# Altium PCB TMTT.PcbDoc
Units mm, origin at the board's own origin, x right, y up, seen from the top; angles counter-clockwise.
Board outline 65.81 x 59.41 mm, 8 copper layers (Top Layer, Layer 1, Layer 2, Layer 3, Layer 4, Layer 5, Layer 6, Bottom Layer), stack 1.028 mm thick; 16 components, 21 nets, 119 pads, 1224 vias.
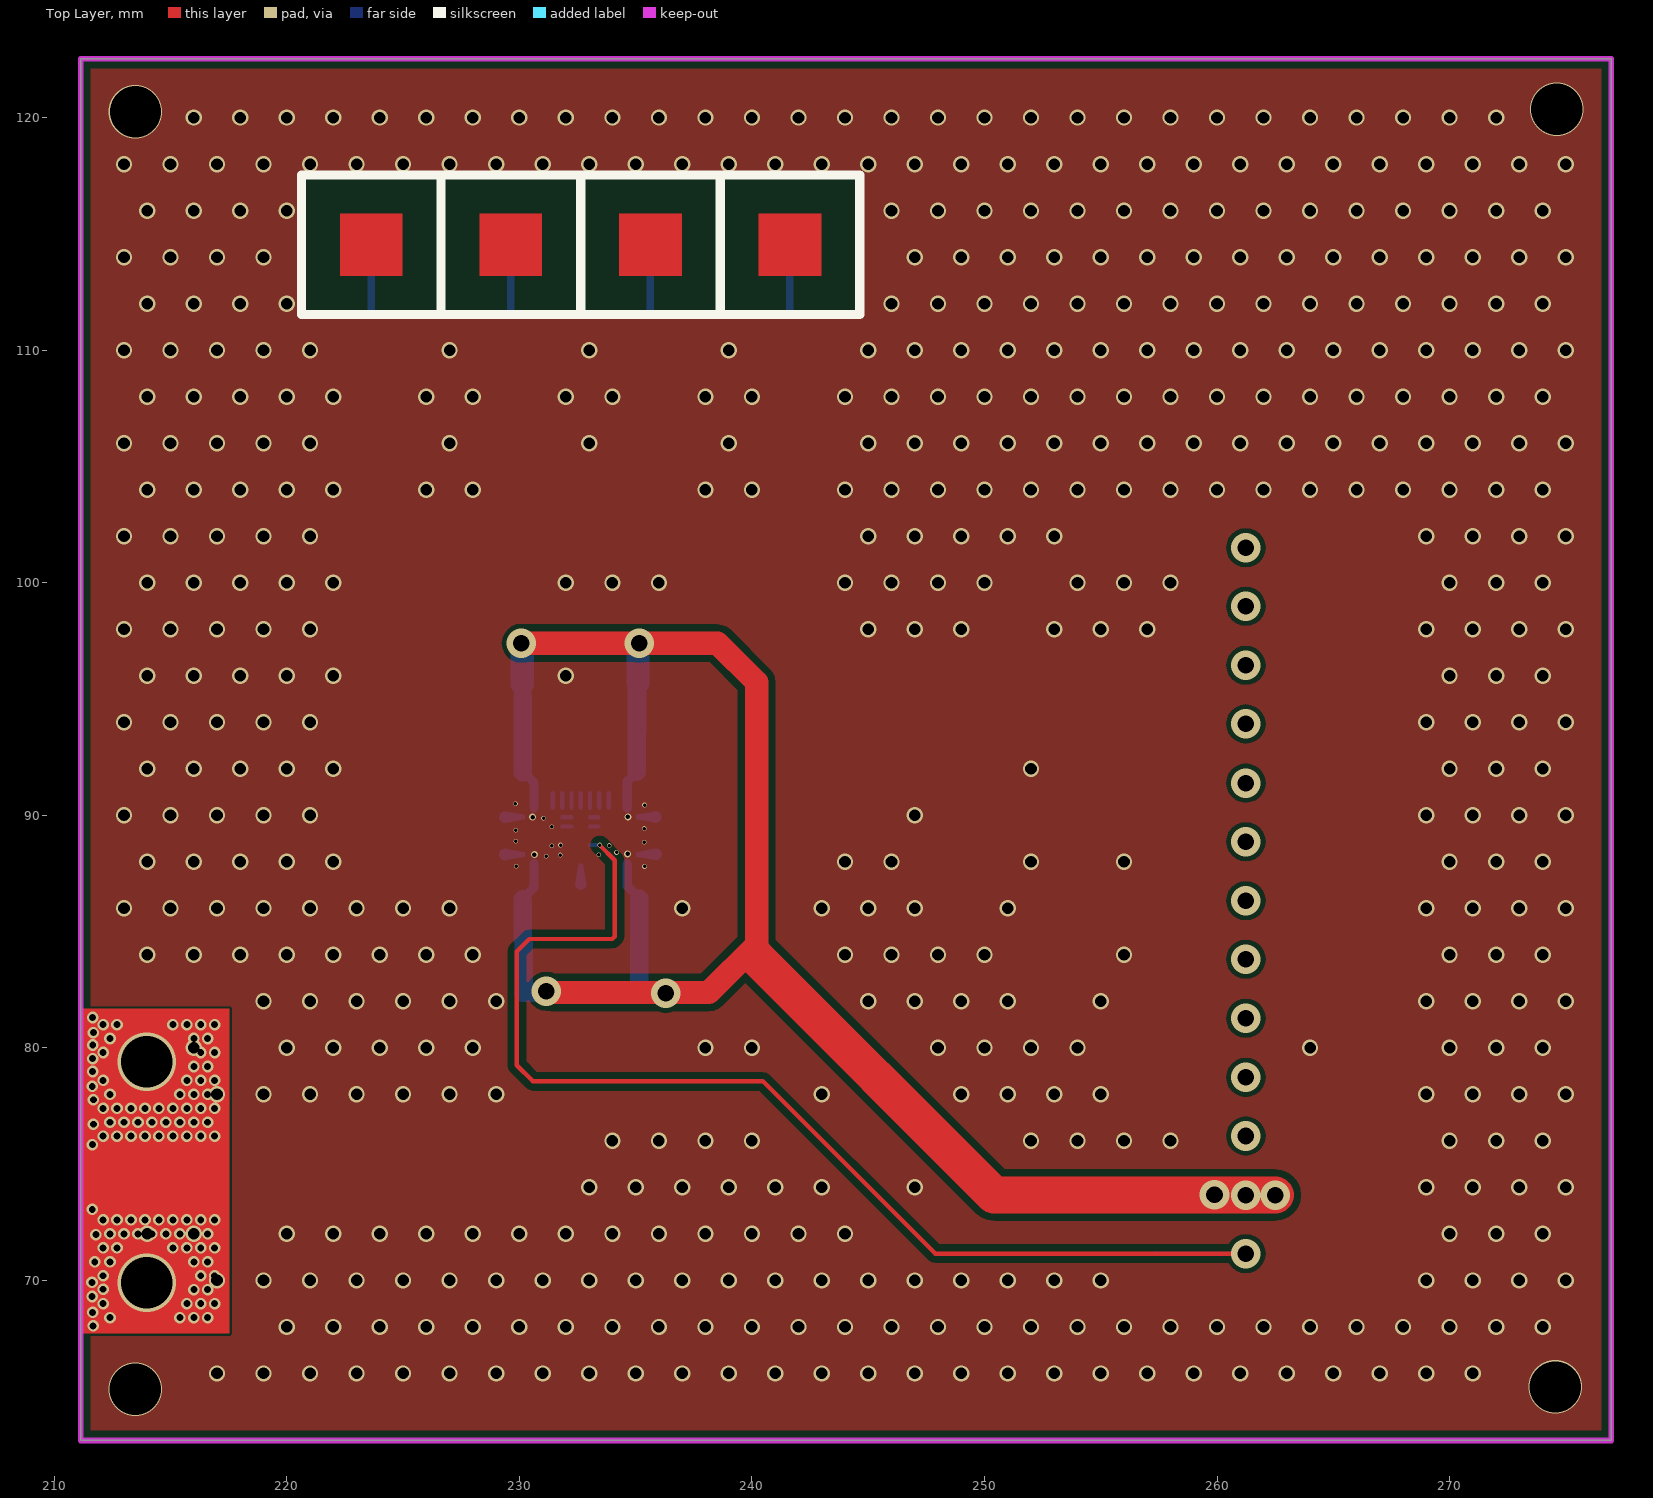
[diagram p0: Top Layer view]
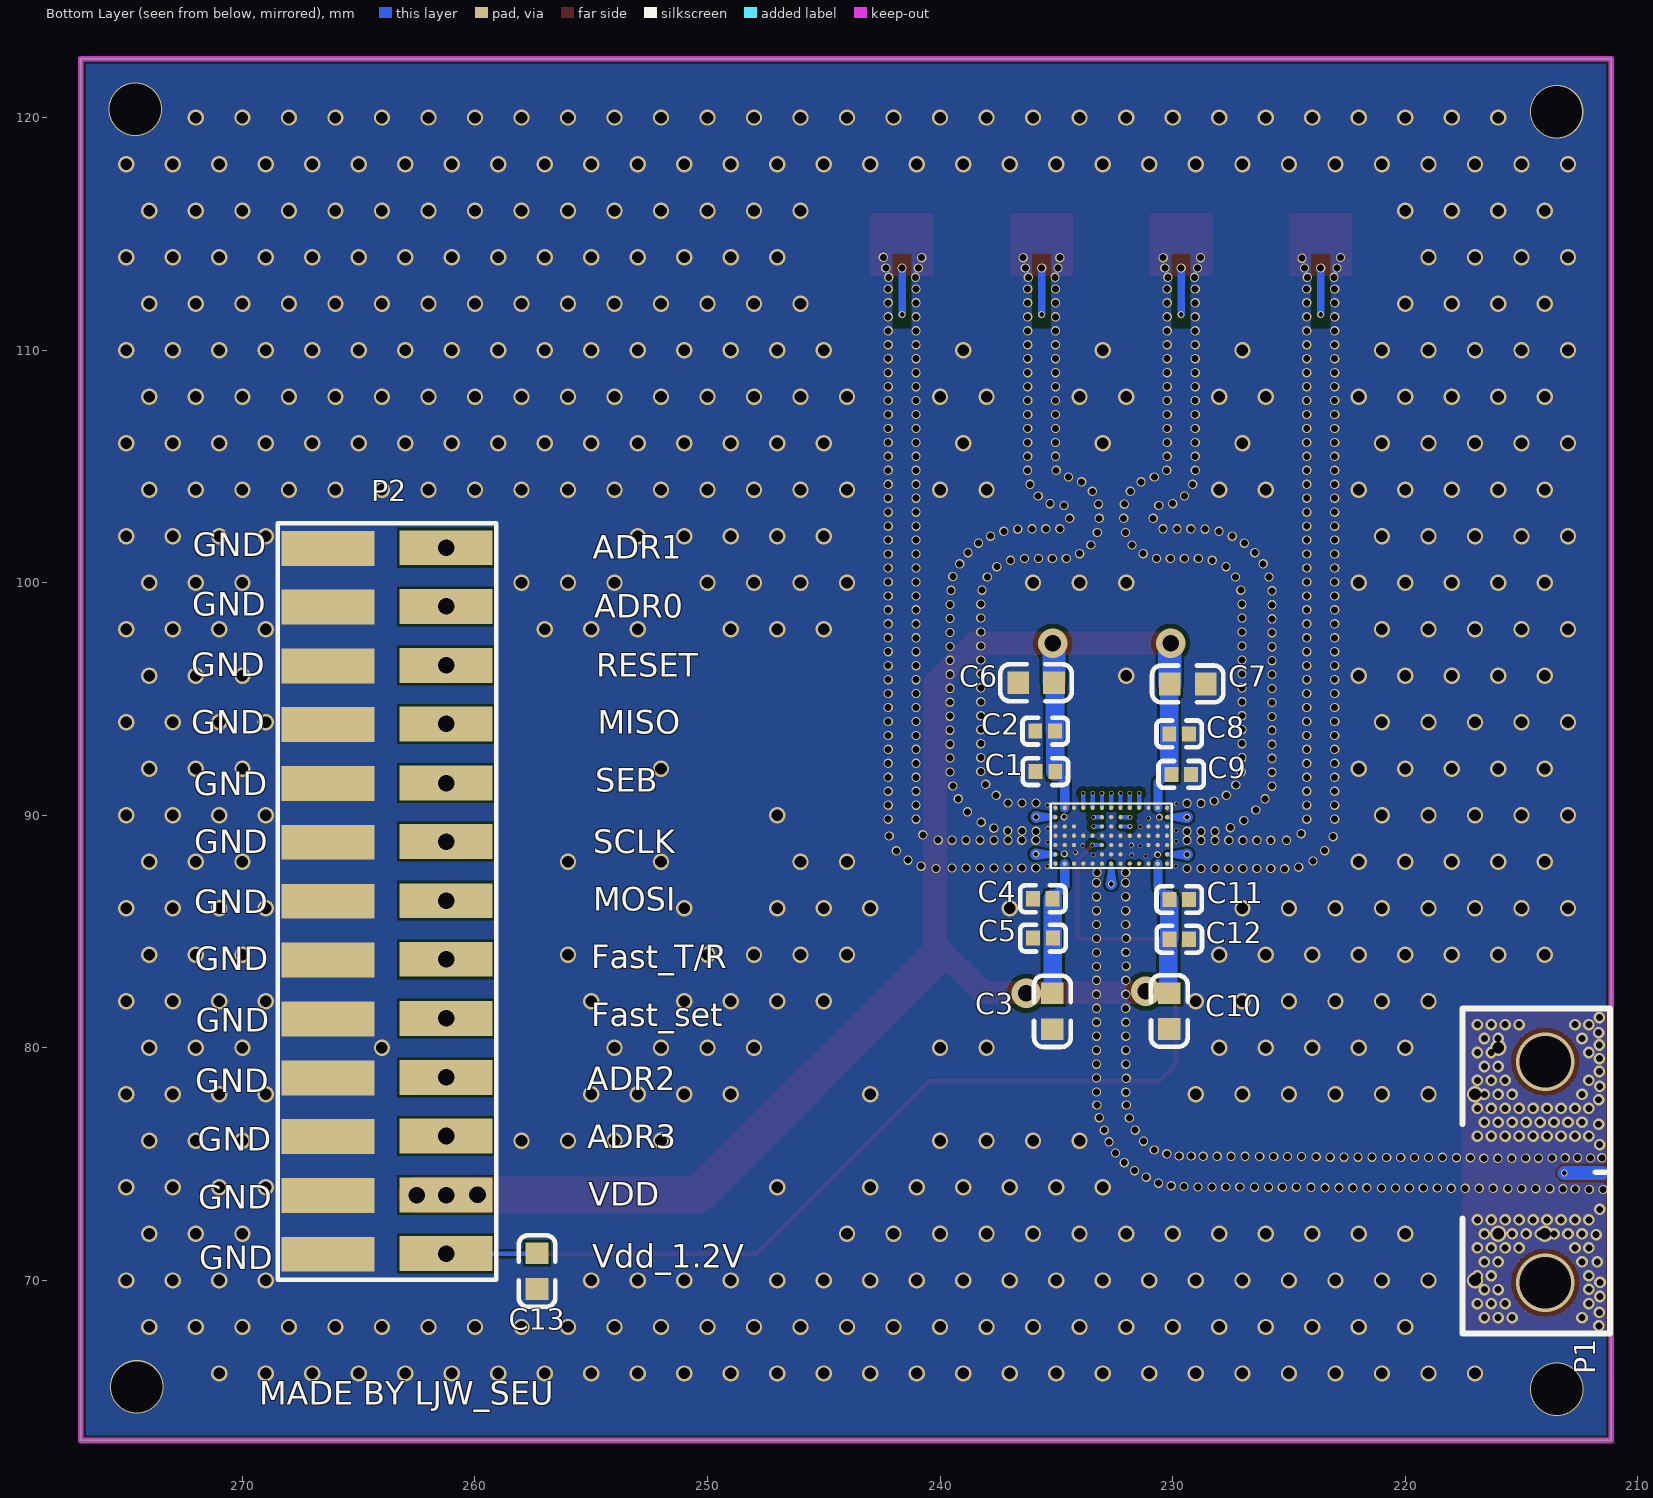
[diagram p1: Bottom Layer view, seen from below]
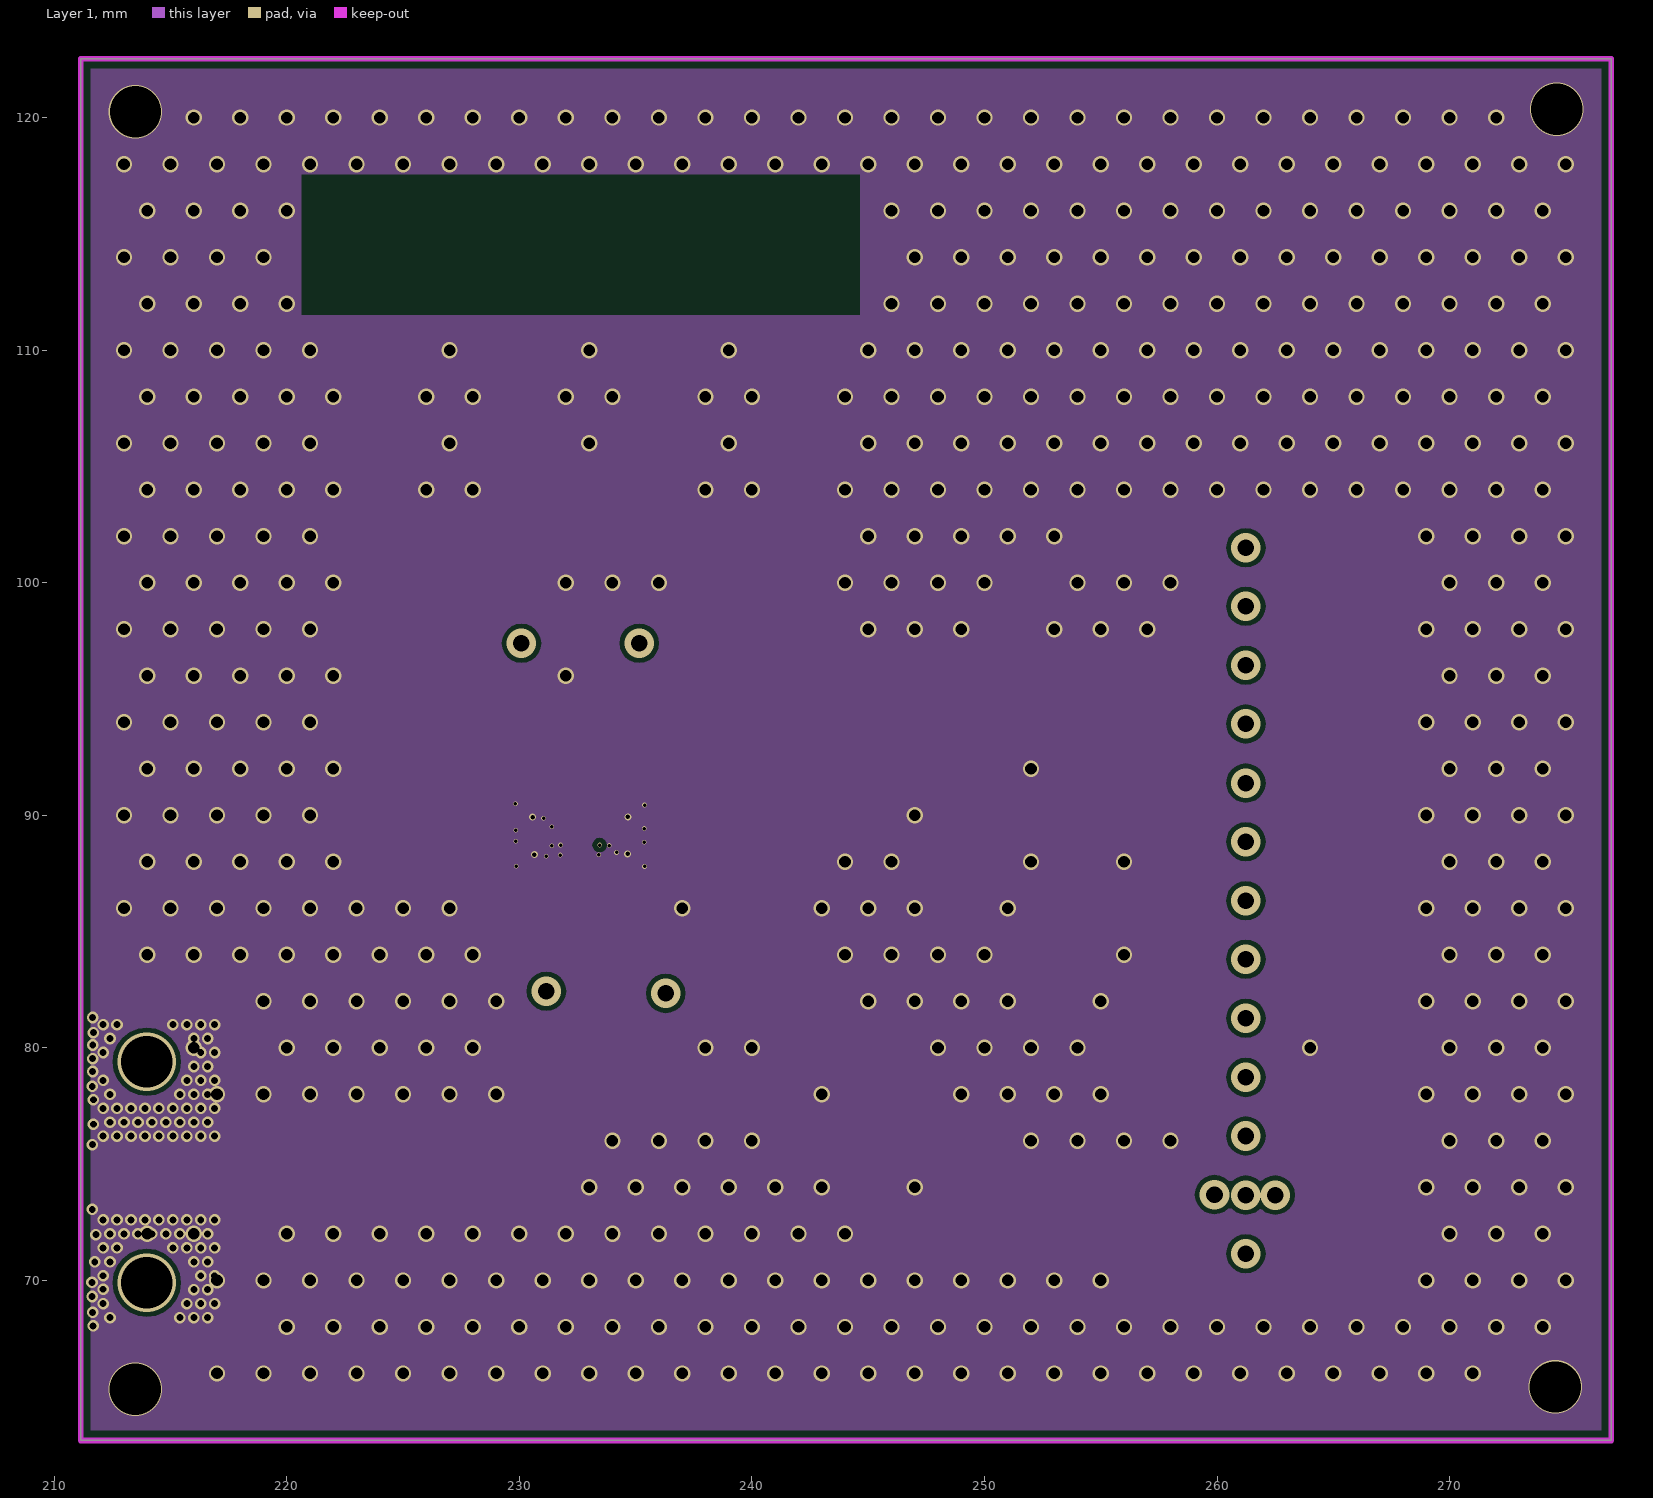
[diagram p2: Layer 1]
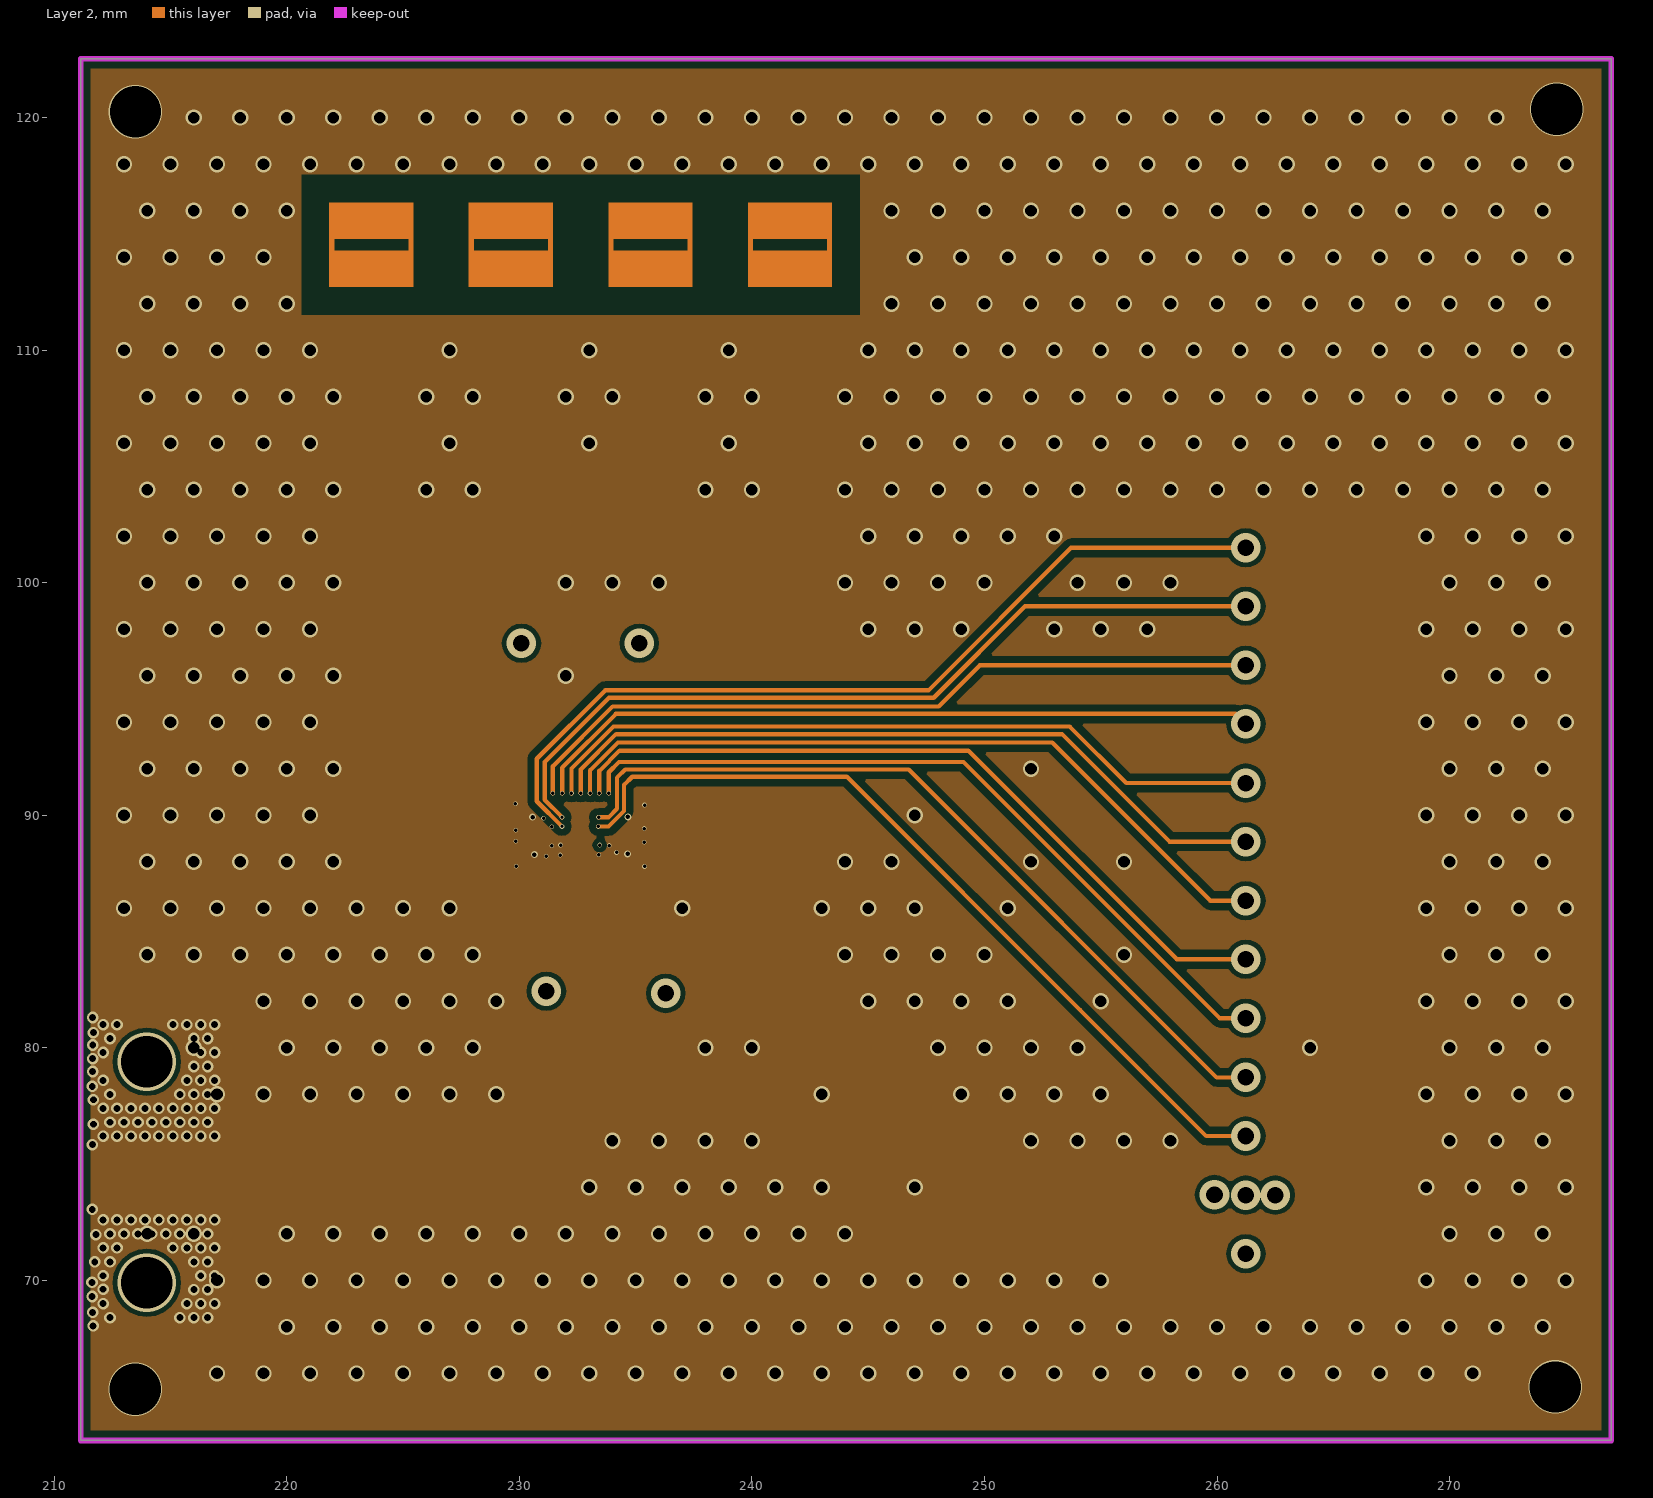
[diagram p3: Layer 2]
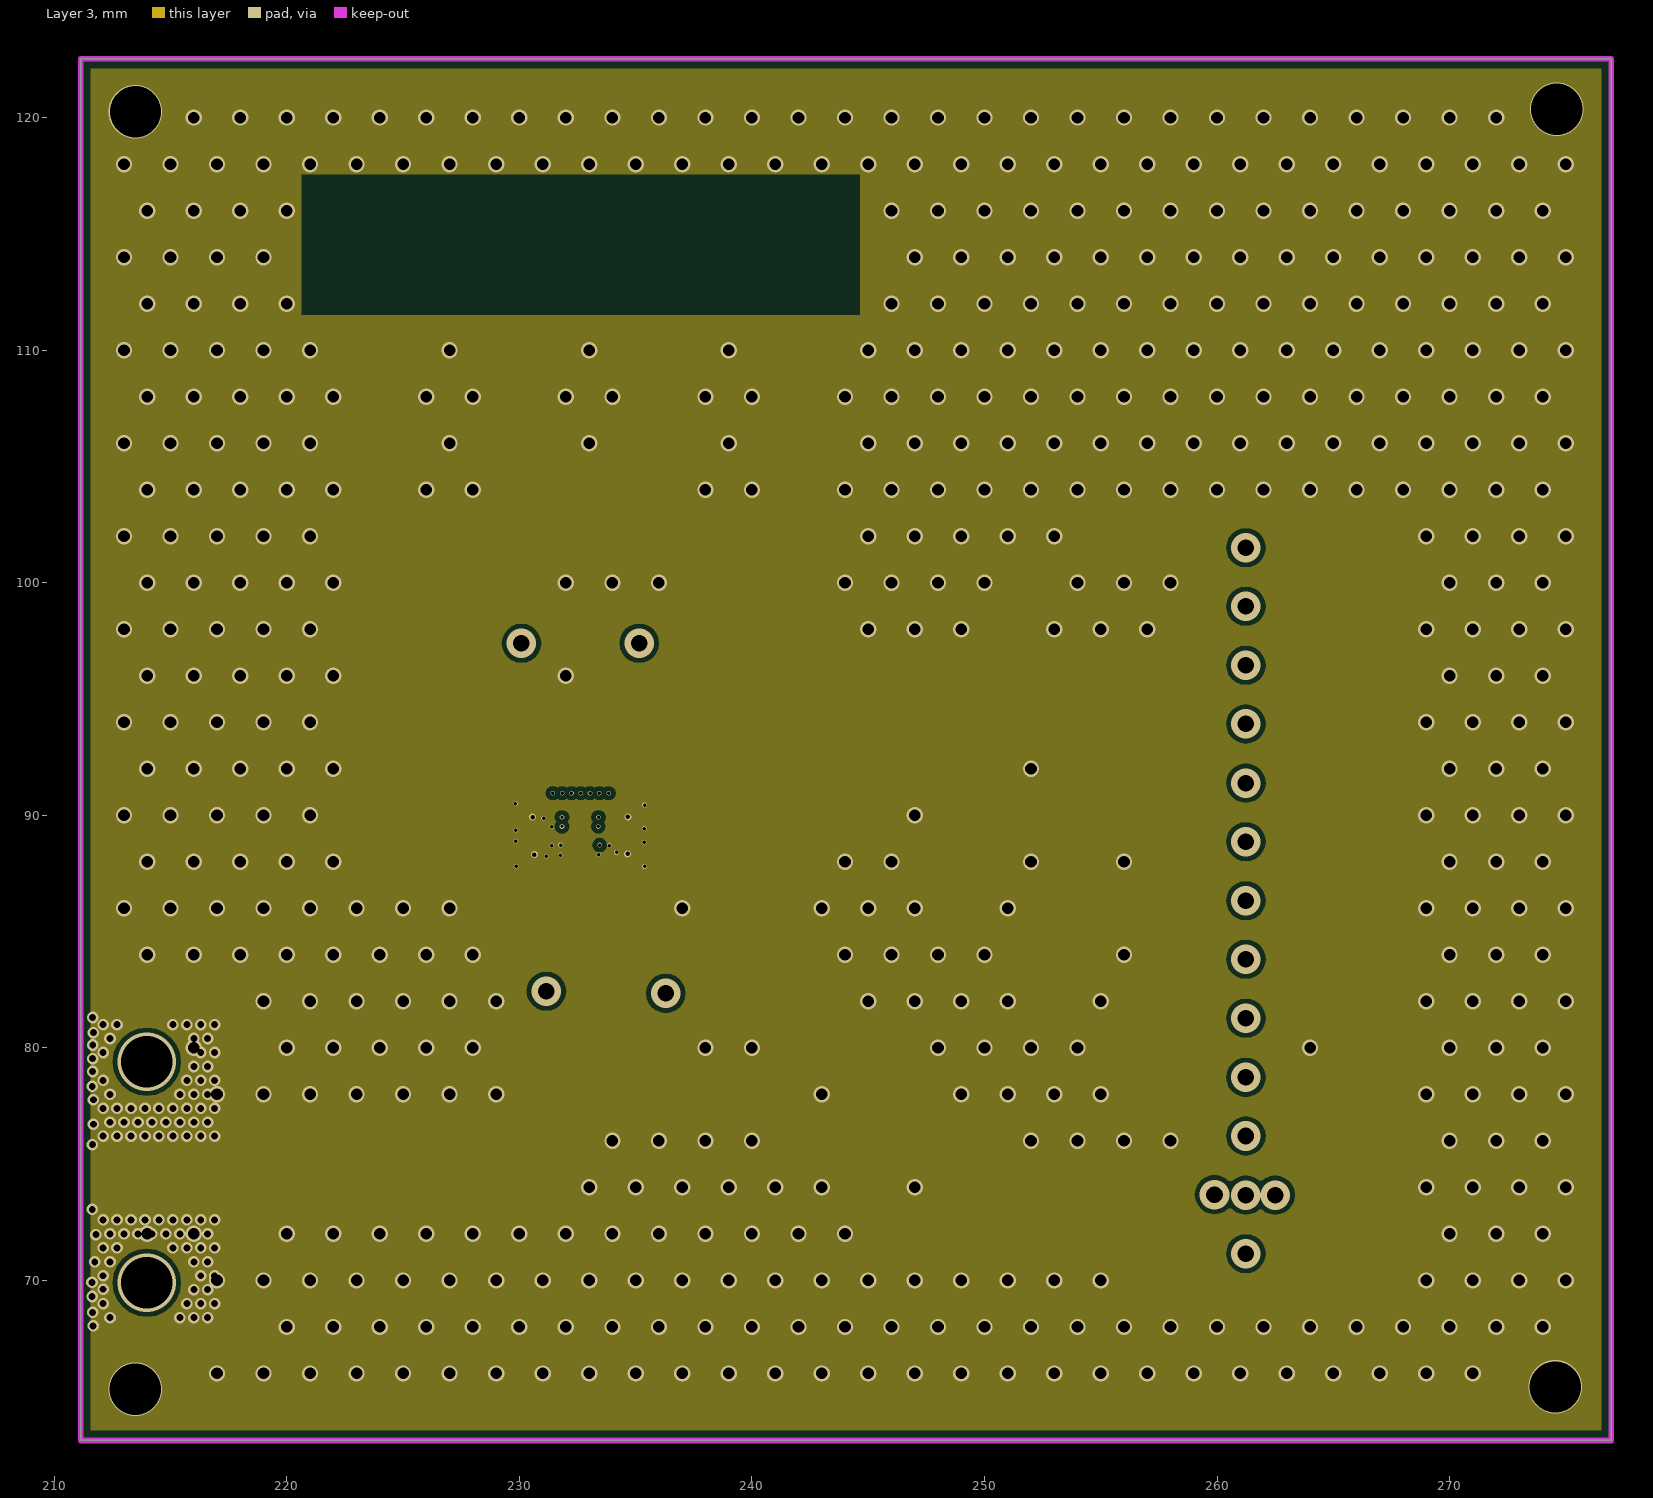
[diagram p4: Layer 3]
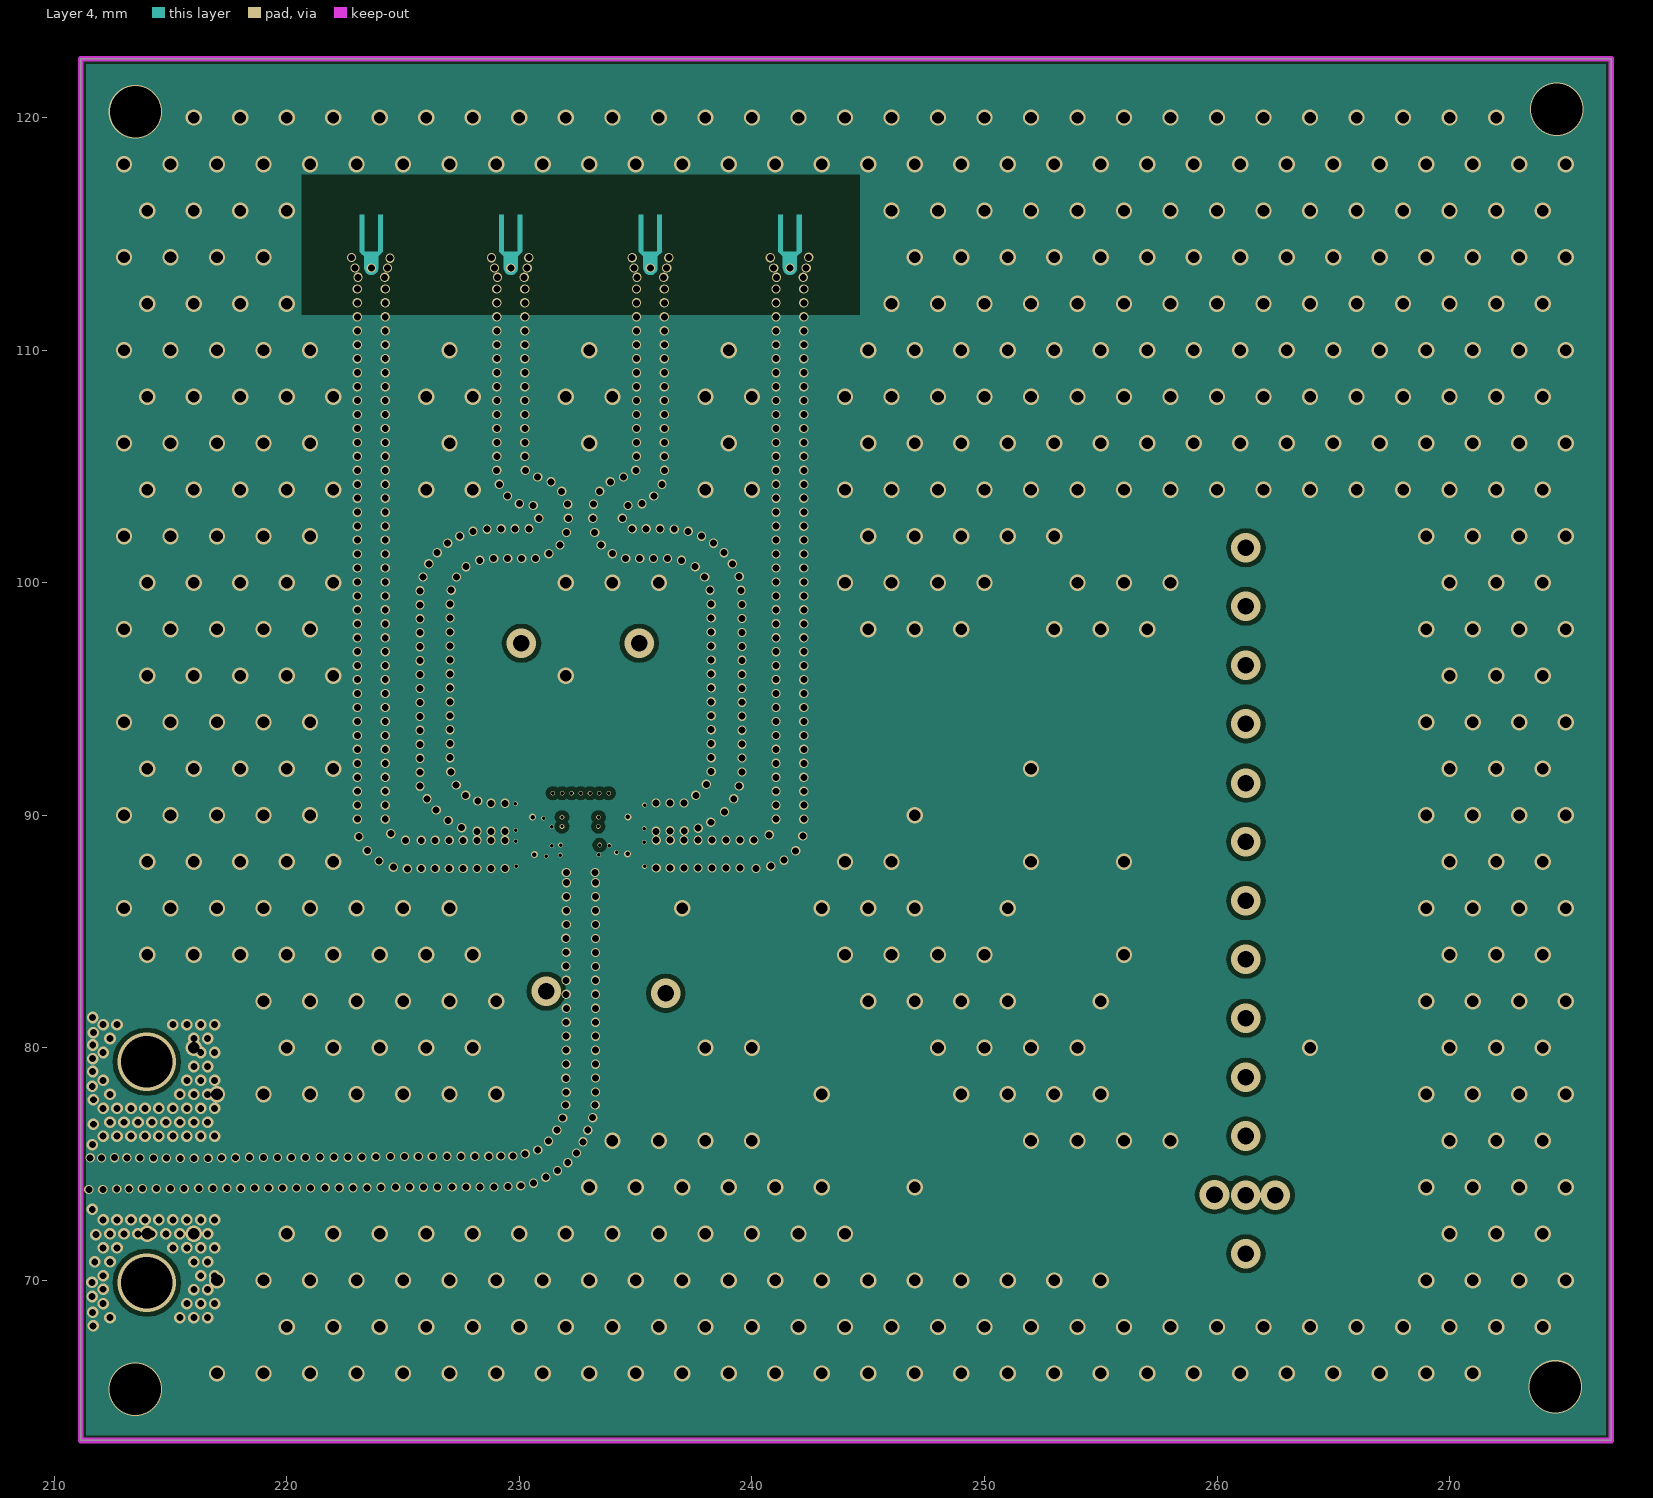
[diagram p5: Layer 4]
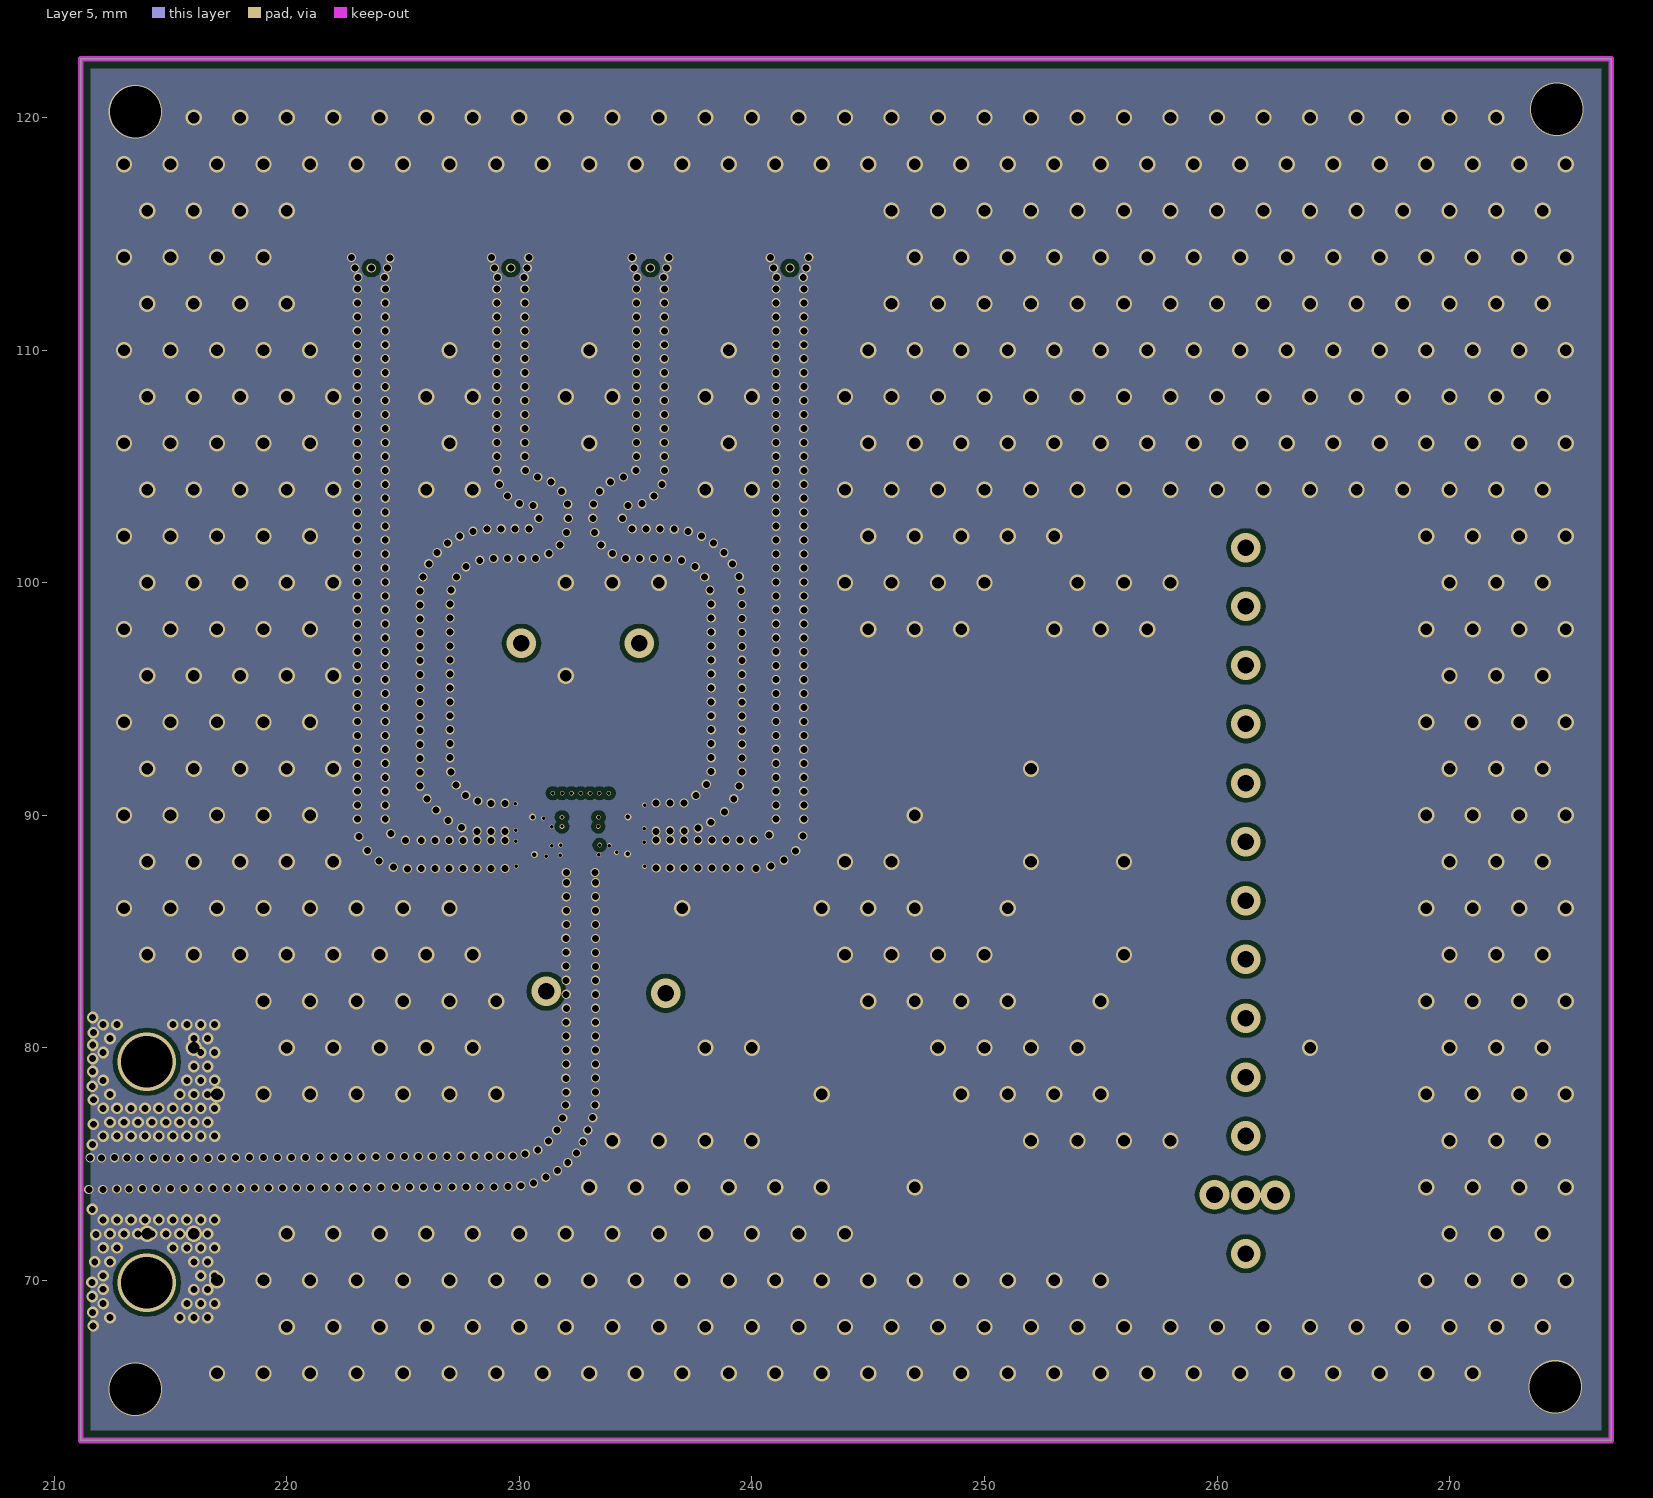
[diagram p6: Layer 5]
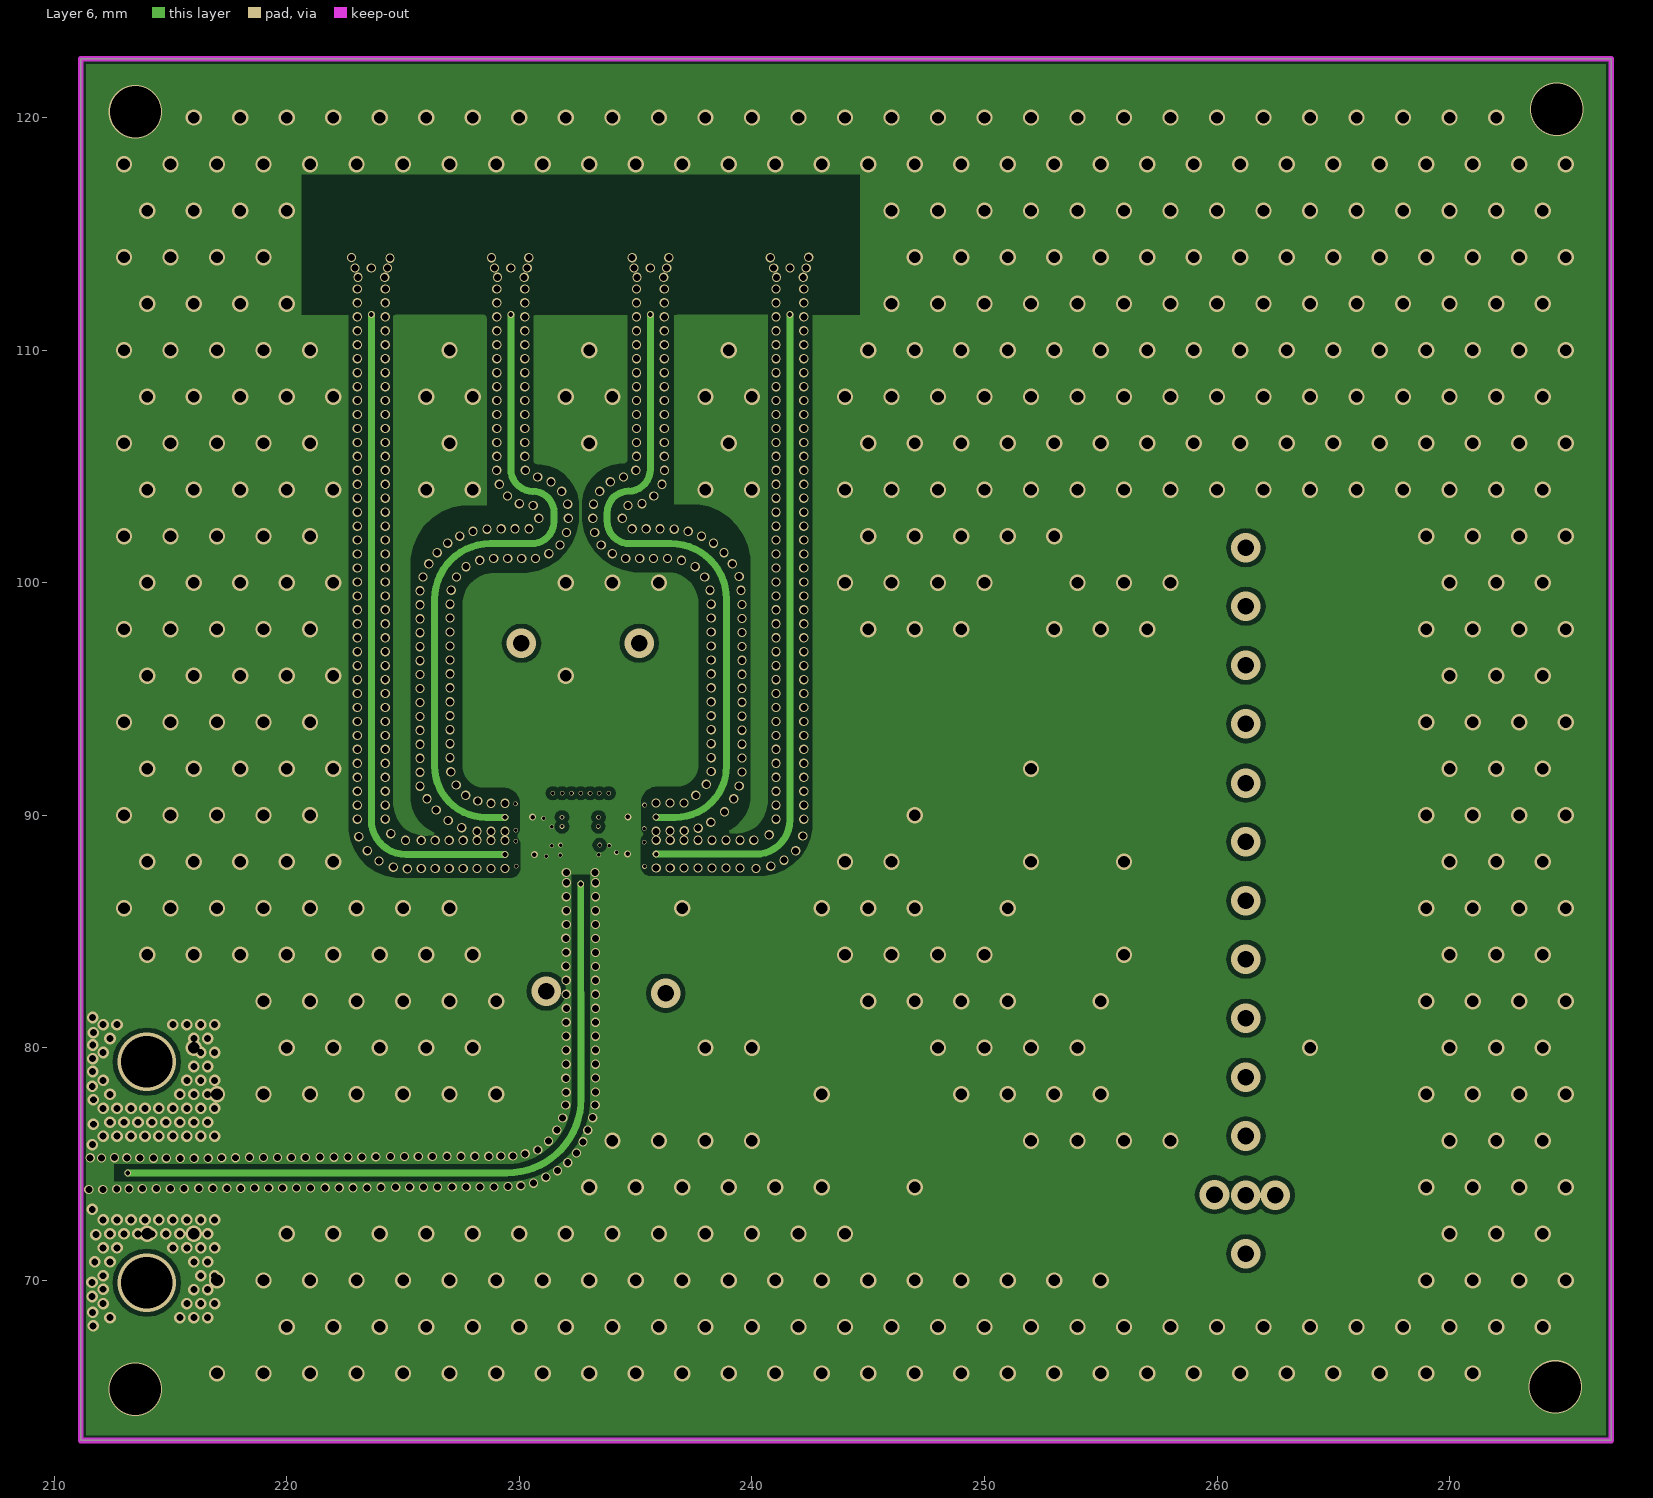
[diagram p7: Layer 6]
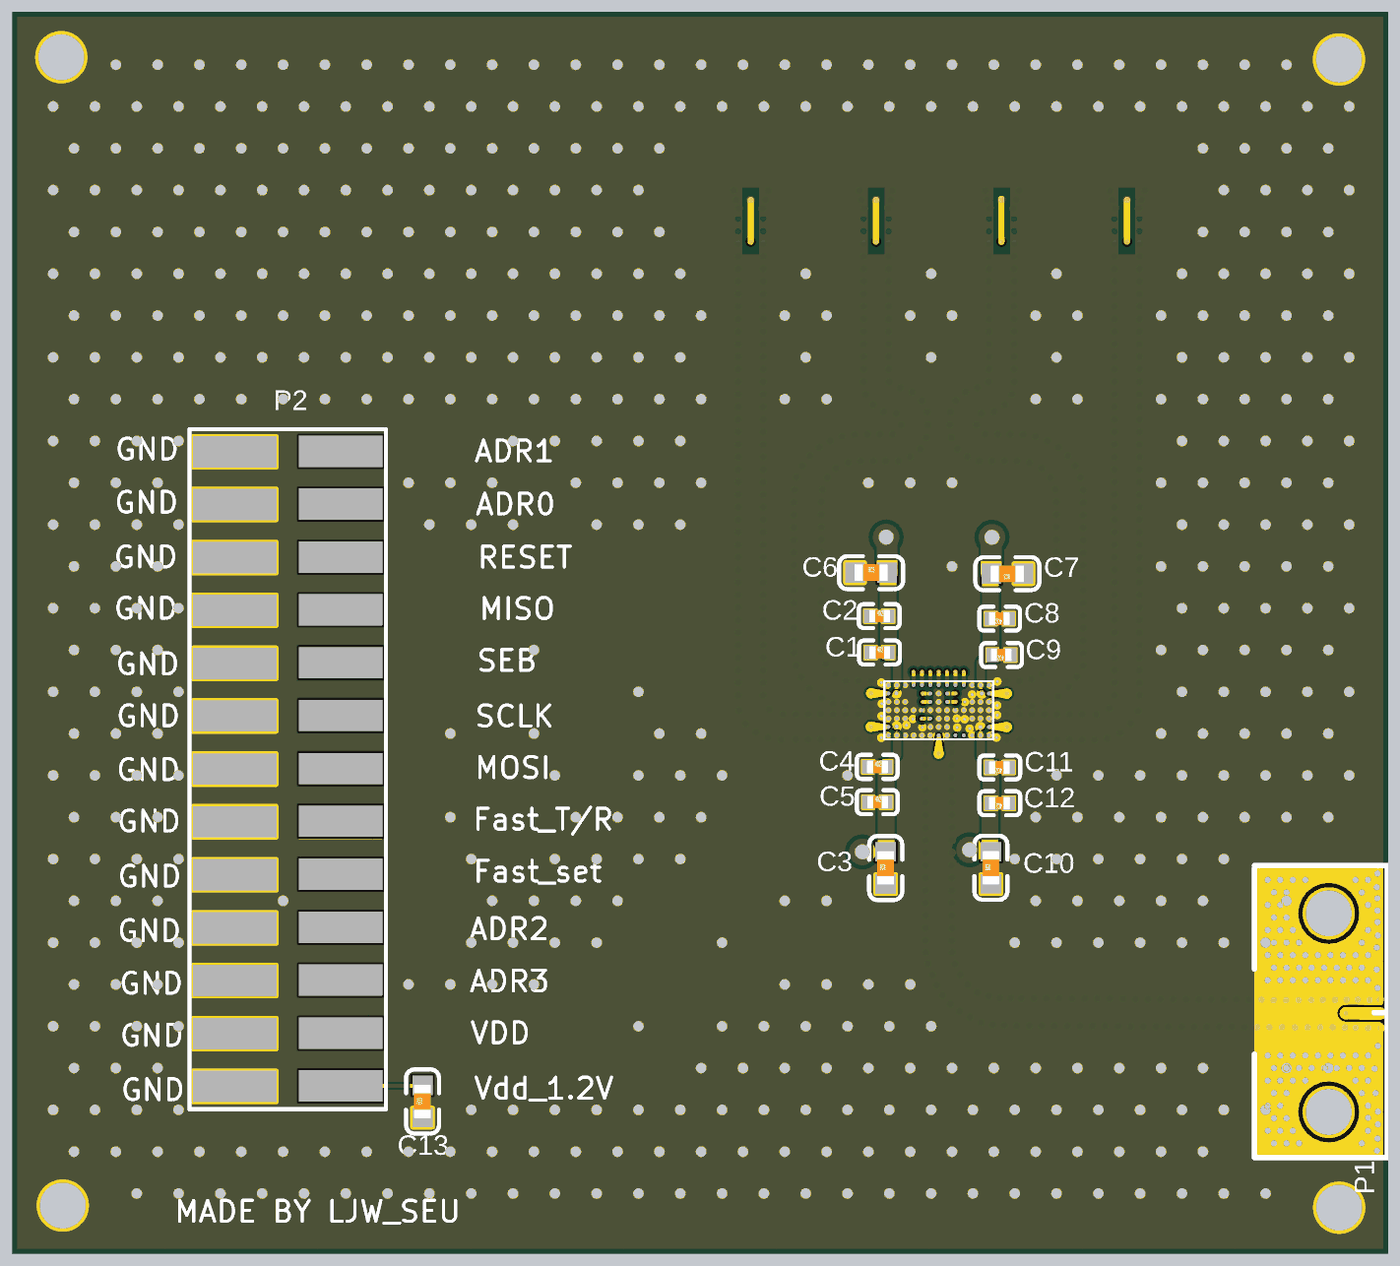
[diagram p8: 3D render of the assembled board from below, using the file's embedded part models]

## Layer stack, top to bottom
Top Solder: solder mask 0.0102, Solder Resist, Dk 3.5
Top Layer: signal copper 0.0356
Dielectric 4: prepreg 0.0711, PP-006, Dk 4.1
Layer 1: signal copper 0.035
Dielectric 2: prepreg 0.0711, PP-006, Dk 4.1
Layer 2: signal copper 0.035
Dielectric 6: prepreg 0.0711, PP-006, Dk 4.1
Layer 3: signal copper 0.035
Dielectric 1: dielectric 0.32, FR-4, Dk 4.8
Layer 4: signal copper 0.035
Dielectric 7: prepreg 0.0711, PP-006, Dk 4.1
Layer 5: signal copper 0.035
Dielectric 3: prepreg 0.0711, PP-006, Dk 4.1
Layer 6: signal copper 0.035
Dielectric 5: prepreg 0.0711, PP-006, Dk 4.1
Bottom Layer: signal copper 0.0356
Bottom Solder: solder mask 0.0102, Solder Resist, Dk 3.5

## Board outline
211.14,63.119 211.14,122.53 276.95,122.53 276.95,63.119

## Design rules (kind name [scope] priority, off if disabled: settings)
Clearance [All] p1: gap=0.01 ignorepadtopadclearanceinfootprint=FALSE except(0.1: Track-Poly Track-Region SMDPad-Poly Fill-Poly Fill-Region Poly-Region Region-Region; 0.2: Via-Poly Via-Region Poly-Hole Region-Hole)
HoleToHoleClearance [All] p1: gap=0 allowstackedmicrovias=TRUE
MinimumSolderMaskSliver [All] p1: minsoldermaskwidth=0
PlaneConnect [All] p1: planeconnectstyle=Direct reliefexpansion=0.508 reliefentries=4 reliefconductorwidth=0.254 reliefairgap=0.254
PolygonConnect [All] p1: connectstyle=Direct reliefconductorwidth=0.254 reliefentries=4 polygonreliefangle="90 Angle" airgapwidth=0.254
RoutingVias [All] p1: holewidth=0.711 width=1.27 viastyle="Through Hole" minholewidth=0.711 minwidth=1.27 maxholewidth=0.711 maxwidth=1.27
SilkToSilkClearance [All] p1: silktosilkclearance=0.01
SilkToSolderMaskClearance [IsPad] p1: minsilkscreentomaskgap=0.01 clearancetoexposedcopper=TRUE
SolderMaskExpansion [All] p1: expansion=0.102 istentingtop=FALSE
Width [All] p1: maxlimit=2 minlimit=0.1 preferedwidth=0.185
25 further rules are at their usual default settings.

## Classes and differential pairs
component class Sheet1: C1 C2 C3 C4 C5 C6 C7 C8 C9 C10 C11 C12 C13 MS050B

## Components (designator, comment, footprint, x,y, rotation, side; value= is the part's Value field where it differs from the comment)
A2 "Component_1" PCBComponent_1#1 236.764,90.588 r180 bottom
C1 "100pF" 0402_C 235.473,91.88 r180 bottom
C2 "100nF" 0402_C 235.483,93.62 r180 bottom
C3 "10uF" 0603_C 235.173,81.57 r90 bottom
C4 "100pF" 0402_C 235.583,86.41 r180 bottom
C5 "100nF" 0402_C 235.578,84.72 r180 bottom
C6 "10uF" 0603_C 235.873,95.7 r180 bottom
C7 "10uF" 0603_C 229.353,95.65 r0 bottom
C8 "100pF" 0402_C 229.72,93.5 r0 bottom
C9 "100nF" 0402_C 229.633,91.76 r0 bottom
C10 "10uF" 0603_C 230.143,81.58 r90 bottom
C11 "100pF" 0402_C 229.718,86.38 r0 bottom
C12 "100nF" 0402_C 229.713,84.67 r0 bottom
C13 "10uF" 0603_C 257.33,70.4 r90 bottom
P1 "Comment" PCBComponent_1#2 213.98,79.4 r270 bottom
P2 "Header 13X2A" PCBComponent_1#3 263.02,97.588 r0 bottom (schematic designator P5)

## Footprints (in the part's own frame and the unit in brackets; to place one, negate y for a bottom-side part, rotate by r counter-clockwise, add the part's x,y. Pads: shape width x height; smd on the part's side, far side on the other; paste and mask are expansions set on the pad)
0402_C [mm]
  rect 0.6x0.65 smd mask+0.051: 1(-0.425,0) 2(0.425,0)
  silkscreen extent -0.97,-0.58 0.98,0.58, body extent -0.48,-0.3 0.52,0.3, height 0.2
0603_C [mm]
  rect 0.93x0.98 smd: 1(-0.77,0) 2(0.77,0)
  silkscreen extent -1.53,-0.79 1.54,0.79, body extent -0.8,-0.4 0.8,0.4, height 0.3
PCBComponent_1#1 [mm]
  round 0.185 smd mask+0.05: A1(6.524,-0.268) A2(6.124,-0.268) A3(5.724,-0.268) A4(5.324,-0.268) A5(4.924,-0.268) A6(4.524,-0.268) A7(4.124,-0.268) A8(3.724,-0.268) A9(3.324,-0.268) A10(2.924,-0.268) A11(2.524,-0.268) A12(2.124,-0.268) A13(1.724,-0.268) B1(6.524,-0.668) B6(4.524,-0.668) B7(4.124,-0.668) B8(3.724,-0.668) B13(1.724,-0.668) C1(6.524,-1.068) C2(6.124,-1.068) C3(5.724,-1.068) C6(4.524,-1.068) C7(4.124,-1.068) C8(3.724,-1.068) C11(2.524,-1.068) C12(2.124,-1.068) C13(1.724,-1.068) D1(6.524,-1.468) D2(6.124,-1.468) D3(5.724,-1.468) D4(5.324,-1.468) D5(4.924,-1.468) D6(4.524,-1.468) D7(4.124,-1.468) D8(3.724,-1.468) D9(3.324,-1.468) D10(2.924,-1.468) D11(2.524,-1.468) D12(2.124,-1.468) D13(1.724,-1.468) E1(6.524,-1.868) E2(6.124,-1.868) E3(5.724,-1.868) E6(4.524,-1.868) E7(4.124,-1.868) E8(3.724,-1.868) E11(2.524,-1.868) E12(2.124,-1.868) E13(1.724,-1.868) F1(6.524,-2.268) F6(4.524,-2.268) F7(4.124,-2.268) F8(3.724,-2.268) F13(1.724,-2.268) G1(6.524,-2.668) G2(6.124,-2.668) G4(5.324,-2.668) G5(4.924,-2.668) G6(4.524,-2.668) G7(4.124,-2.668) G8(3.724,-2.668) G9(3.324,-2.668) G10(2.924,-2.668) G11(2.524,-2.668) G12(2.124,-2.668) G13(1.724,-2.668)
  round 0.185 smd: G3(5.724,-2.668)
  silkscreen extent 1.52,-2.86 6.73,-0.08
PCBComponent_1#2 [mm]
  silkscreen extent -2.29,-3.56 11.68,2.79
PCBComponent_1#3 [mm]
  rect 4x1.5 smd: 1(-1.778,-3.916) 2(-1.778,-1.397) 3(-1.778,1.143) 4(-1.778,3.662) 5(-1.778,6.202) 6(-1.778,8.721) 7(-1.778,11.261) 8(-1.778,13.78) 9(-1.778,16.32) 10(-1.778,18.86) 11(-1.778,21.379) 12(-1.778,23.919) 13(-1.778,26.438) 14(3.3,-3.891) 15(3.3,-1.372) 16(3.3,1.168) 17(3.3,3.687) 18(3.3,6.227) 19(3.3,8.746) 20(3.3,11.286) 21(3.3,13.805) 22(3.3,16.345) 23(3.3,18.885) 24(3.3,21.404) 25(3.3,23.944) 26(3.3,26.463)
  silkscreen extent -3.94,-4.97 5.46,27.56

## Part data
C1 C4 C8 C11: library part "0402 10pF (100) 5% 50V", "贴片电容", Package=0402, SuppliersPartNumber=C32949, ComponentLink1Description=供应商链接, ComponentLink1URL=http://www.szlcsc.com/product/details_33914.html, Supplier=LC
C2 C5 C9 C12: library part "0402 1nF (102) 10% 50V", "贴片电容", Package=0402, SuppliersPartNumber=C1523, ComponentLink1Description=供应商链接, ComponentLink1URL=http://www.szlcsc.com/product/details_1875.html, Supplier=LC
C3 C6 C7 C10 C13: library part "0603 68pF (680) 5% 50V", "贴片电容", Package=0603, SuppliersPartNumber=C28262, ComponentLink1Description=供应商链接, ComponentLink1URL=http://www.szlcsc.com/product/details_29012.html, Supplier=LC
P2: "Header, 13-Pin, Dual row", LatestRevisionDate=17-Jul-2002, LatestRevisionNote="Re-released for DXP Platform.", Publisher="Altium Limited"

## Via types
v1: diameter 0.4, hole 0.3, Layer 4 to Bottom Layer, tented bottom, 538 vias
v2: diameter 0.7, hole 0.5, Top Layer to Bottom Layer, tented both sides, 514 vias
v3: diameter 0.5, hole 0.3, Top Layer to Bottom Layer, 104 vias
v4: diameter 1.27, hole 0.711, Top Layer to Bottom Layer, tented both sides, 19 vias
v5: diameter 0.2, hole 0.15, Top Layer to Bottom Layer, 18 vias
v6: diameter 0.2, hole 0.15, Layer 2 to Bottom Layer, 11 vias
v7: diameter 0.3, hole 0.2, Layer 6 to Bottom Layer, 10 vias
v8: diameter 0.3, hole 0.2, Top Layer to Bottom Layer, 4 vias
v9: diameter 2.3, hole 2.2, Top Layer to Bottom Layer, 4 vias
v10: diameter 2.5, hole 2.2, Top Layer to Bottom Layer, 2 vias

## Nets (pads, with @x,y where several pads share a name; then routed paths per layer and width w, separated by ;. In a path a pad name is that pad's centre, name@x,y a point inside that pad or via, vN(x,y) a via of type N, cw(c..) or ccw(c..) an arc to the next point about the centre after c; other vN are vias at no path point)
ADR0: A2.B6 | length 36
  Layer 2 w0.185: v6(231.833,89.92) 231.09,90.663 231.09,92.29 233.855,95.055 247.815,95.055 251.745,98.985 v4(261.242,98.985)
  Bottom Layer w0.185: v6(231.833,89.92) A2.B6
ADR1: A2.C6 | length 38
  Layer 2 w0.185: v6(231.833,89.52) 230.75,90.603 230.75,92.43 233.69,95.37 247.59,95.37 253.724,101.504 v4(261.242,101.504)
  Bottom Layer w0.185: v6(231.833,89.52) A2.C6
ADR2: A2.B8 | length 35.3
  Layer 2 w0.185: v6(233.403,89.91) 233.831,89.91 234.2,90.279 234.2,91.62 234.55,91.97 246.74,91.97 259.982,78.728 v4(261.242,78.728)
  Bottom Layer w0.185: A2.B8 233.403,89.92 v6(233.403,89.91)
ADR3: A2.C8 | length 36.1
  Layer 2 w0.185: v6(233.393,89.52) 233.833,89.52 234.5,90.187 234.5,91.307 234.85,91.657 244.083,91.657 254.13,81.61 259.531,76.209 v4(261.242,76.209)
  Bottom Layer w0.185: A2.C8 v6(233.393,89.52)
Fast_set: A2.A10 | length 33.7
  Layer 2 w0.185: v6(233.84,90.95) 233.84,91.85 234.28,92.29 249.1,92.29 260.122,81.268 v4(261.242,81.268)
  Bottom Layer w0.185: A2.A10 v6(233.84,90.95)
Fast_T/R: A2.A9 | length 33.5
  Layer 2 w0.185: v6(233.44,90.95) 233.44,91.91 234.31,92.78 249.3,92.78 258.272,83.808 v4(261.242,83.808)
  Bottom Layer w0.185: A2.A9 v6(233.44,90.95)
GND: A2.A1 A2.A3 A2.A11 A2.A13 A2.B7 A2.C1 A2.C2 A2.C3 A2.C7 A2.C11 A2.C12 A2.C13 A2.D1 A2.D2 A2.D3 A2.D4 A2.D5 A2.D6 A2.D7 A2.D8 A2.D9 A2.D10 A2.D11 A2.D12 A2.D13 A2.E1 A2.E2 A2.E3 A2.E6 A2.E7 A2.E11 A2.E12 A2.E13 A2.F6 A2.F7 A2.F8 A2.G1 A2.G3 A2.G6 A2.G8 A2.G9 A2.G10 A2.G11 A2.G13 C1.1 C2.1 C3.1 C4.1 C5.1 C6.1 C7.1 C8.1 C9.1 C10.1 C11.1 C12.1 C13.1
  other v1: 211.487,73.908 212.087,73.908 212.687,73.928 213.21,73.94 213.789,73.947 214.389,73.947 214.989,73.947 215.589,73.947 216.219,73.957 216.819,73.957 217.419,73.957 218.019,73.957 218.619,73.977 219.22,73.97 219.82,73.97 220.42,73.97 221.02,73.97 221.65,73.98 222.25,73.98 222.85,73.98 223.45,73.98 224.05,74 224.68,74.01 225.28,74.01 225.88,74.01 226.48,74.01 227.11,74.02 227.71,74.02 228.31,74.02 228.91,74.02 229.51,74.04 230.06,74.07 230.61,74.18 231.14,74.44 231.64,74.72 232.08,75.06 215.418,75.247 216.018,75.247 216.618,75.247 211.542,75.271 212.03,75.26 213.12,75.27 213.68,75.26 214.269,75.258 214.817,75.254 212.59,75.28 217.196,75.274 217.796,75.274 218.396,75.294 218.997,75.287 219.597,75.287 220.197,75.287 220.797,75.287 221.427,75.297 222.027,75.297 222.627,75.297 223.227,75.297 223.827,75.317 224.457,75.327 225.057,75.327 225.657,75.327 226.257,75.327 226.887,75.337 227.487,75.337 228.087,75.337 228.687,75.337 229.2,75.35 229.72,75.35 230.25,75.44 232.46,75.48 230.79,75.611 232.74,75.96 231.253,75.989 231.611,76.462 232.94,76.46 231.86,76.98 233.15,77 231.99,77.54 233.26,77.54 232.01,78.09 233.27,78.1 232,78.69 233.27,78.7 232.01,79.3 233.27,79.3 232.01,79.9 233.27,79.9 232.01,80.5 233.27,80.5 232.01,81.1 233.27,81.1 232.02,81.7 233.27,81.7 232.01,82.3 233.27,82.3 232.01,82.9 233.27,82.9 233.27,83.5 232,83.51 232.01,84.11 233.27,84.1 232,84.71 233.27,84.7 232.02,85.3 233.27,85.3 232.02,85.9 233.27,85.9 232.02,86.5 233.27,86.5 232.03,87.1 233.27,87.1 232.02,87.54 233.253,87.54 225.18,87.7 225.78,87.714 226.38,87.714 226.98,87.714 227.58,87.714 228.18,87.714 228.78,87.714 229.38,87.714 240.172,87.709 235.883,87.73 236.483,87.73 237.083,87.73 237.683,87.73 238.283,87.73 238.883,87.73 239.483,87.73 224.58,87.77 240.81,87.81 223.96,88.03 241.38,88.07 223.46,88.48 241.88,88.47 225.1,88.92 225.78,88.921 226.38,88.921 226.98,88.921 227.58,88.921 228.18,88.921 228.78,88.921 229.38,88.921 235.883,88.93 236.483,88.93 237.083,88.93 237.683,88.93 238.283,88.93 238.883,88.93 239.483,88.93 240.083,88.93 223.096,89.078 242.19,89.11 240.74,89.16 224.47,89.21 228.179,89.31 228.779,89.31 229.379,89.31 235.876,89.312 236.48,89.33 237.09,89.33 237.691,89.444 227.52,89.47 238.23,89.7 226.938,89.778 223.033,89.833 224.233,89.833 241.033,89.833 242.233,89.833 238.82,90.15 226.42,90.23 223.033,90.433 224.233,90.433 241.033,90.433 242.233,90.433 228.779,90.515 229.379,90.515 235.876,90.526 236.476,90.526 237.076,90.526 228.21,90.61 226.03,90.71 239.218,90.706 227.69,90.86 237.588,90.856 223.033,91.033 224.233,91.033 241.033,91.033 242.233,91.033 225.73,91.25 239.45,91.26 227.28,91.3 238.04,91.33 223.033,91.633 224.233,91.633 241.033,91.633 242.233,91.633 225.73,91.85 227.05,91.87 238.25,91.88 239.57,91.86 223.033,92.233 224.233,92.233 241.033,92.233 242.233,92.233 225.73,92.45 239.57,92.46 227.016,92.48 238.25,92.48 223.033,92.833 224.233,92.833 241.033,92.833 242.233,92.833 225.73,93.05 239.57,93.06 227.016,93.08 238.25,93.08 223.033,93.433 224.233,93.433 241.033,93.433 242.233,93.433 225.73,93.65 239.57,93.66 227.016,93.68 238.25,93.68 223.033,94.033 224.233,94.033 241.033,94.033 242.233,94.033 225.73,94.25 239.57,94.26 227.016,94.28 238.25,94.28 223.033,94.633 224.233,94.633 241.033,94.633 242.233,94.633 225.73,94.85 227.016,94.88 238.25,94.88 239.57,94.86 223.033,95.233 224.233,95.233 241.033,95.233 242.233,95.233 225.73,95.45 239.57,95.46 227.016,95.48 238.25,95.48 223.033,95.833 224.233,95.833 241.033,95.833 242.233,95.833 225.73,96.05 239.57,96.06 227.016,96.08 238.25,96.08 223.033,96.433 224.233,96.433 241.033,96.433 242.233,96.433 225.73,96.65 227.016,96.68 238.25,96.68 239.57,96.66 223.033,97.033 224.233,97.033 241.033,97.033 242.233,97.033 225.73,97.25 239.57,97.26 227.016,97.28 238.25,97.28 223.033,97.633 224.233,97.633 241.033,97.633 242.233,97.633 225.73,97.85 239.57,97.86 227.016,97.88 238.25,97.88 223.033,98.233 224.233,98.233 241.033,98.233 242.233,98.233 225.73,98.45 239.57,98.46 227.016,98.48 238.25,98.48 223.033,98.833 224.233,98.833 241.033,98.833 242.233,98.833 225.73,99.05 239.57,99.06 227.016,99.08 238.25,99.08 223.033,99.433 224.233,99.433 241.033,99.433 242.233,99.433 225.73,99.65 227.066,99.68 238.2,99.68 239.53,99.67 223.033,100.033 224.233,100.033 241.033,100.033 242.233,100.033 225.86,100.25 227.296,100.25 237.97,100.25 239.45,100.27 223.033,100.633 224.233,100.633 241.033,100.633 242.233,100.633 227.706,100.69 237.56,100.69 226.106,100.81 239.16,100.81 228.296,100.96 236.97,100.96 228.896,101.04 229.496,101.04 230.096,101.04 230.696,101.04 234.57,101.04 235.17,101.04 235.77,101.04 236.37,101.04 223.033,101.233 224.233,101.233 231.266,101.25 234,101.25 241.033,101.233 242.233,101.233 226.466,101.29 238.8,101.29 231.746,101.62 233.52,101.62 226.916,101.7 238.35,101.7 223.033,101.833 224.233,101.833 241.033,101.833 242.233,101.833 227.436,102 237.83,102 232.026,102.16 233.24,102.16 228.006,102.21 237.26,102.21 228.606,102.3 229.216,102.32 229.816,102.32 230.416,102.32 234.85,102.32 235.45,102.32 236.05,102.32 236.66,102.3 223.033,102.433 224.233,102.433 241.033,102.433 242.233,102.433 230.836,102.77 232.106,102.77 233.16,102.77 234.43,102.77 223.033,103.033 224.233,103.033 241.033,103.033 242.233,103.033 230.596,103.32 234.67,103.32 232.076,103.38 233.19,103.38 229.996,103.4 235.27,103.4 223.033,103.633 224.233,103.633 241.033,103.633 242.233,103.633 229.486,103.73 235.78,103.73 231.816,103.93 233.45,103.93 223.033,104.233 224.233,104.233 229.136,104.23 236.13,104.23 241.033,104.233 242.233,104.233 231.356,104.34 233.91,104.34 230.786,104.55 234.48,104.55 223.033,104.833 224.233,104.833 229.026,104.83 230.256,104.83 235.01,104.83 236.24,104.83 241.033,104.833 242.233,104.833 223.033,105.433 224.233,105.433 229.033,105.433 230.233,105.433 235.033,105.433 236.233,105.433 241.033,105.433 242.233,105.433 223.033,106.033 224.233,106.033 229.033,106.033 230.233,106.033 235.033,106.033 236.233,106.033 241.033,106.033 242.233,106.033 223.033,106.633 224.233,106.633 229.033,106.633 230.233,106.633 235.033,106.633 236.233,106.633 241.033,106.633 242.233,106.633 223.033,107.233 224.233,107.233 229.033,107.233 230.233,107.233 235.033,107.233 236.233,107.233 241.033,107.233 242.233,107.233 223.033,107.833 224.233,107.833 229.033,107.833 230.233,107.833 235.033,107.833 236.233,107.833 241.033,107.833 242.233,107.833 223.033,108.433 224.233,108.433 229.033,108.433 230.233,108.433 235.033,108.433 236.233,108.433 241.033,108.433 242.233,108.433 223.033,109.033 224.233,109.033 229.033,109.033 230.233,109.033 235.033,109.033 236.233,109.033 241.033,109.033 242.233,109.033 223.033,109.633 224.233,109.633 229.033,109.633 230.233,109.633 235.033,109.633 236.233,109.633 241.033,109.633 242.233,109.633 223.033,110.233 224.233,110.233 229.033,110.233 230.233,110.233 235.033,110.233 236.233,110.233 241.033,110.233 242.233,110.233 223.033,110.833 224.233,110.833 229.033,110.833 230.233,110.833 235.033,110.833 236.233,110.833 241.033,110.833 242.233,110.833 223.033,111.433 224.233,111.433 229.033,111.433 230.233,111.433 235.033,111.433 236.233,111.433 241.033,111.433 242.233,111.433 223.033,112.033 224.233,112.033 229.033,112.033 230.233,112.033 235.033,112.033 236.233,112.033 241.033,112.033 242.233,112.033 223.033,112.633 224.233,112.633 229.033,112.633 230.233,112.633 235.033,112.633 236.233,112.633 241.033,112.633 242.233,112.633 223.059,113.131 224.206,113.131 229.059,113.131 230.206,113.131 235.059,113.131 236.206,113.131 241.059,113.131 242.206,113.131 222.933,113.533 224.333,113.533 228.933,113.533 230.333,113.533 234.933,113.533 236.333,113.533 240.933,113.533 242.333,113.533 224.44,113.957 228.8,113.977 230.41,113.977 234.85,113.977 236.43,113.977 240.79,113.977 222.78,113.987 242.44,113.99
  other v2: 217,66 219,66 221,66 223,66 225,66 227,66 229,66 231,66 233,66 235,66 237,66 239,66 241,66 243,66 245,66 247,66 249,66 251,66 253,66 255,66 257,66 259,66 261,66 263,66 265,66 267,66 269,66 271,66 220,68 222,68 224,68 226,68 228,68 230,68 232,68 234,68 236,68 238,68 240,68 242,68 244,68 246,68 248,68 250,68 252,68 254,68 256,68 258,68 260,68 262,68 264,68 266,68 268,68 270,68 272,68 274,68 217,70 219,70 221,70 223,70 225,70 227,70 229,70 231,70 233,70 235,70 237,70 239,70 241,70 243,70 245,70 247,70 249,70 251,70 253,70 255,70 269,70 271,70 273,70 275,70 214,72 216,72 220,72 222,72 224,72 226,72 228,72 230,72 232,72 234,72 236,72 238,72 240,72 242,72 244,72 270,72 272,72 274,72 233,74 235,74 237,74 239,74 241,74 243,74 247,74 269,74 271,74 273,74 275,74 234,76 236,76 238,76 240,76 252,76 254,76 256,76 258,76 270,76 272,76 274,76 217,78 219,78 221,78 223,78 225,78 227,78 229,78 243,78 249,78 251,78 253,78 255,78 269,78 271,78 273,78 275,78 216,80 220,80 222,80 224,80 226,80 228,80 238,80 240,80 248,80 250,80 252,80 254,80 264,80 270,80 272,80 274,80 219,82 221,82 223,82 225,82 227,82 229,82 245,82 247,82 249,82 251,82 255,82 269,82 271,82 273,82 275,82 214,84 216,84 218,84 220,84 222,84 224,84 226,84 228,84 244,84 246,84 248,84 250,84 256,84 270,84 272,84 274,84 213,86 215,86 217,86 219,86 221,86 223,86 225,86 227,86 237,86 243,86 245,86 247,86 251,86 269,86 271,86 273,86 275,86 214,88 216,88 218,88 220,88 222,88 244,88 246,88 252,88 256,88 270,88 272,88 274,88 213,90 215,90 217,90 219,90 221,90 247,90 269,90 271,90 273,90 275,90 214,92 216,92 218,92 220,92 222,92 252,92 270,92 272,92 274,92 213,94 215,94 217,94 219,94 221,94 269,94 271,94 273,94 275,94 214,96 216,96 218,96 220,96 222,96 232,96 270,96 272,96 274,96 213,98 215,98 217,98 219,98 221,98 245,98 247,98 249,98 253,98 255,98 257,98 269,98 271,98 273,98 275,98 214,100 216,100 218,100 220,100 222,100 232,100 234,100 236,100 244,100 246,100 248,100 250,100 254,100 256,100 258,100 270,100 272,100 274,100 213,102 215,102 217,102 219,102 221,102 245,102 247,102 249,102 251,102 253,102 269,102 271,102 273,102 275,102 214,104 216,104 218,104 220,104 222,104 226,104 228,104 238,104 240,104 244,104 246,104 248,104 250,104 252,104 254,104 256,104 258,104 260,104 262,104 264,104 266,104 268,104 270,104 272,104 274,104 213,106 215,106 217,106 219,106 221,106 227,106 233,106 239,106 245,106 247,106 249,106 251,106 253,106 255,106 257,106 259,106 261,106 263,106 265,106 267,106 269,106 271,106 273,106 275,106 214,108 216,108 218,108 220,108 222,108 226,108 228,108 232,108 234,108 238,108 240,108 244,108 246,108 248,108 250,108 252,108 254,108 256,108 258,108 260,108 262,108 264,108 266,108 268,108 270,108 272,108 274,108 213,110 215,110 217,110 219,110 221,110 227,110 233,110 239,110 245,110 247,110 249,110 251,110 253,110 255,110 257,110 259,110 261,110 263,110 265,110 267,110 269,110 271,110 273,110 275,110 214,112 216,112 218,112 220,112 246,112 248,112 250,112 252,112 254,112 256,112 258,112 260,112 262,112 264,112 266,112 268,112 270,112 272,112 274,112 213,114 215,114 217,114 219,114 247,114 249,114 251,114 253,114 255,114 257,114 259,114 261,114 263,114 265,114 267,114 269,114 271,114 273,114 275,114 214,116 216,116 218,116 220,116 246,116 248,116 250,116 252,116 254,116 256,116 258,116 260,116 262,116 264,116 266,116 268,116 270,116 272,116 274,116 213,118 215,118 217,118 219,118 221,118 223,118 225,118 227,118 229,118 231,118 233,118 235,118 237,118 239,118 241,118 243,118 245,118 247,118 249,118 251,118 253,118 255,118 257,118 259,118 261,118 263,118 265,118 267,118 269,118 271,118 273,118 275,118 216,120 218,120 220,120 222,120 224,120 226,120 228,120 230,120 232,120 234,120 236,120 238,120 240,120 242,120 244,120 246,120 248,120 250,120 252,120 254,120 256,120 258,120 260,120 262,120 264,120 266,120 268,120 270,120 272,120
  other v3: 211.67,68.048 212.4,68.4 215.4,68.4 216,68.4 216.6,68.4 211.647,68.625 212.1,69 215.7,69 216.3,69 216.9,69 211.63,69.306 216,69.6 216.6,69.6 212.1,69.619 211.625,69.914 212.1,70.2 216.3,70.2 216.9,70.2 211.741,70.801 212.4,70.8 216,70.8 216.6,70.8 212.1,71.4 212.7,71.4 215.1,71.4 215.7,71.4 216.3,71.4 216.9,71.4 211.791,71.969 212.4,72 213,72 213.6,72 214.2,72 214.8,72 215.4,72 216,72 216.6,72 212.1,72.6 212.7,72.6 213.3,72.6 213.9,72.6 214.5,72.6 215.1,72.6 215.7,72.6 216.3,72.6 216.9,72.6 211.633,73.059 211.641,75.834 212.1,76.2 212.7,76.2 213.3,76.2 213.9,76.2 214.5,76.2 215.1,76.2 215.7,76.2 216.3,76.2 216.9,76.2 211.684,76.714 212.4,76.8 213,76.8 213.6,76.8 214.2,76.8 214.8,76.8 215.4,76.8 216,76.8 216.6,76.8 212.1,77.4 212.7,77.4 213.3,77.4 213.9,77.4 214.5,77.4 215.1,77.4 215.7,77.4 216.3,77.4 216.9,77.4 211.684,77.767 212.4,78 215.4,78 216,78 216.6,78 211.633,78.341 212.1,78.6 215.7,78.6 216.3,78.6 216.9,78.6 211.648,78.981 216,79.2 216.6,79.2 211.648,79.533 212.1,79.8 216.3,79.8 216.9,79.8 211.655,80.122 212.4,80.4 216,80.4 216.6,80.4 211.684,80.652 212.1,81 212.7,81 215.1,81 215.7,81 216.3,81 216.9,81 211.648,81.306
  other v5: 229.873,87.81 235.383,87.8 231.159,88.24 231.757,88.29 233.42,88.3 234.18,88.4 231.4,88.69 233.87,88.7 231.77,88.72 235.373,88.84 229.843,88.89 229.843,89.35 235.363,89.43 231.39,89.51 231.04,89.87 235.383,90.44 229.833,90.49
  other v8: 230.643,88.31 234.653,88.34 230.573,89.92 234.663,89.93
  other v9: 213.48,65.32 274.54,65.42 213.49,120.25 274.61,120.36
MISO: A2.A5 | length 32.3
  Layer 2 w0.185: v6(231.84,90.95) 231.84,92.05 234.15,94.36 260.808,94.36 v4(261.242,93.926)
  Bottom Layer w0.185: A2.A5 v6(231.84,90.95)
MOSI: A2.A8 | length 33.1
  Layer 2 w0.185: v6(233.04,90.95) 233.04,91.93 234.24,93.13 252.91,93.13 259.713,86.327 v4(261.242,86.327)
  Bottom Layer w0.185: A2.A8 v6(233.04,90.95)
NetA2_B1: A2.B1 | length 28.5
  Layer 6 w0.3: v7(229.379,89.915) 229.379,89.91 228.556,89.91 cw(c228.556,92.106) 226.36,92.106 226.36,99.292 cw(c228.748,99.292) 228.748,101.68 230.53,101.68 ccw(c230.53,102.64) 231.49,102.64 231.49,103.018 ccw(c230.576,103.018) 230.576,103.933 230.574,103.933 cw(c230.575,104.874) 229.633,104.874 229.633,104.876 v7(229.633,111.533)
  Bottom Layer w0.5: v7(229.379,89.915) v7@229.38,89.914
  other v1: 229.633,113.533 229.633,113.533
NetA2_B13: A2.B13 | length 28.5
  Layer 6 w0.3: v7(235.633,111.533) 235.633,104.876 cw(c234.691,104.876) 234.692,103.934 ccw(c234.692,103.02) 233.778,103.02 233.778,102.641 ccw(c234.738,102.641) 234.738,101.681 236.52,101.681 cw(c236.52,99.294) 238.908,99.294 238.908,92.107 cw(c236.712,92.107) 236.712,89.911 v7@235.889,89.911
  Bottom Layer w0.5: v7@235.863,89.93 v7@235.864,89.929
  other v1: 235.633,113.533
  other v7: 235.876,89.926
NetA2_F1: A2.F1 | length 28.3
  Layer 6 w0.3: v7(223.633,111.533) 223.633,89.796 ccw(c225.116,89.796) 225.116,88.314 v7(229.38,88.314)
  Bottom Layer w0.5: v7(229.38,88.314) v7@229.382,88.312
  other v1: 223.633,113.533
NetA2_F13: A2.F13 | length 28.3
  Layer 6 w0.3: v7(235.883,88.33) 235.884,88.329 240.166,88.329 ccw(c240.166,89.796) 241.633,89.796 v7(241.633,111.533)
  Bottom Layer w0.5: v7(235.883,88.33) v7@235.884,88.329
  other v1: 241.633,113.533
NetA2_G7: A2.G7 | length 32.2
  Layer 6 w0.3: v7(213.16,74.62) 229.471,74.62 ccw(c229.471,77.802) 232.653,77.802 v7(232.639,87.044)
  Bottom Layer w0.5: v7@232.638,87.045 v7(232.639,87.044)
  Bottom Layer w0.6: 211.529,74.609 v7(213.16,74.62)
PD+: A2.G5
PD-: A2.G4
RESET: A2.A4 | length 33.4
  Layer 2 w0.185: v6(231.44,90.95) 231.44,92.11 234.01,94.68 248.03,94.68 249.795,96.445 v4(261.242,96.445)
  Bottom Layer w0.185: A2.A4 v6(231.44,90.95)
SCLK: A2.A7 | length 32.8
  Layer 2 w0.185: v6(232.64,90.95) 232.64,91.97 234.16,93.49 253.33,93.49 257.953,88.867 v4(261.242,88.867)
  Bottom Layer w0.185: A2.A7 v6(232.64,90.95)
SEB: A2.A6 | length 32.5
  Layer 2 w0.185: v6(232.24,90.95) 232.24,92.01 234.05,93.82 253.66,93.82 256.094,91.386 v4(261.242,91.386)
  Bottom Layer w0.185: A2.A6 v6(232.24,90.95)
VDD: A2.A2 A2.A12 A2.G2 A2.G12 C1.2 C2.2 C3.2 C4.2 C5.2 C6.2 C7.2 C8.2 C9.2 C10.2 C11.2 C12.2 | length 85.4
  Top Layer w0.8: 235.173,82.34 v4(236.293,82.34)
  Top Layer w1: v4@230.098,97.4 v4(235.153,97.4) 238.52,97.4 240.203,95.717 240.203,84.44 238.143,82.38 v4@231.373,82.38
  Top Layer w1.6: 240.153,83.927 250.411,73.669 v4(262.5,73.669)
  Bottom Layer w0.4: C11.2@230.143,86.405 230.623,86.885 230.623,86.99 ; 230.399,91.635 230.633,91.401 A2.A2@230.633,90.32 ; 230.633,87 A2.G2@230.633,87.92 ; A2.G12@234.633,87.92 234.633,86.96 C4.2@235.058,86.535 ; A2.A12@234.633,90.32 234.633,91.46 ; 234.653,91.46 C1.2@235.048,91.855
  Bottom Layer w0.8: C12.2@230.143,84.675 C11.2 ; C9.2@230.143,91.845 C8.2@230.143,93.4 ; C8.2@230.153,93.49 230.153,95.135 ; C10.2@230.173,82.38 v4@231.293,82.38 ; C10.2@230.188,82.395 C12.2@230.188,84.62 ; C1.2 C2.2@235.048,93.61 ; C2.2 C6.2@235.058,95.7 ; C5.2@235.152,84.721 C4.2@235.152,86.404 ; C3.2@235.153,82.34 C5.2
  Bottom Layer w1: v4(230.09,97.392) v4@230.098,97.4 ; C7.2 v4@230.123,97.36 ; C6.2 v4@235.103,97.4
  other v4: 261.242,73.669 259.89,73.69 231.163,82.44
Vdd_1.2V: A2.E8 C13.2 | length 52.6
  Top Layer w0.185: v5(233.45,88.72) 234.1,88.07 234.1,84.784 233.992,84.676 230.426,84.676 229.89,84.14 229.89,79.25 230.58,78.56 240.47,78.56 247.88,71.15 v4(261.242,71.15)
  Bottom Layer w0.185: A2.E8 v5(233.45,88.72) ; C13.2 257.35,71.15 v4(261.242,71.15)
pads on no net: P2.1 P2.2 P2.3 P2.4 P2.5 P2.6 P2.7 P2.8 P2.9 P2.10 P2.11 P2.12 P2.13 P2.14 P2.15 P2.16 P2.17 P2.18 P2.19 P2.20 P2.21 P2.22 P2.23 P2.24 P2.25 P2.26
copper on no net:
  other v10: 213.98,69.9 213.98,79.4

## Polygon pours and split planes (outlines as drawn)
GND on Top Layer "GND_L01_P000" (solid, pour order 0): 211.14,63.119 211.14,122.53 276.95,122.53 276.95,63.119
GND on Layer 1 "GND_L02_P001" (solid, pour order 1): 211.14,63.119 211.14,122.53 276.95,122.53 276.95,63.119
GND on Layer 2 "GND_L03_P002" (solid, pour order 2): 211.14,63.119 211.14,122.53 276.95,122.53 276.95,63.119
GND on Layer 3 "GND_L04_P003" (solid, pour order 3): 211.14,63.119 211.14,122.53 276.95,122.53 276.95,63.119
GND on Layer 5 "GND_L06_P008" (solid, pour order 8): 211.14,63.119 211.14,122.53 276.95,122.53 276.95,63.119
GND on Bottom Layer "GND_L08_P013" (solid, pour order 13): 211.14,63.119 211.14,122.53 276.95,122.53 276.95,63.119
GND on Bottom Layer "GND_L08_P010" (solid, pour order 10): 211.14,63.119 211.14,122.53 276.95,122.53 276.95,63.119
GND on Layer 6 "GND_L07_P012" (solid, pour order 12): 211.14,63.119 211.14,122.53 276.95,122.53 276.95,63.119
GND on Layer 4 "GND_L05_P014" (solid, pour order 14): 211.14,63.119 211.14,122.53 276.95,122.53 276.95,63.119

## Keep-outs
Keep-Out Layer:
  the board outline again, w0.254

## Other copper
Top Layer:
  region net GND: 217.536,81.686 211.186,81.686 211.186,67.716 217.536,67.716
  rectangle: 240.283,113.183 242.983,115.883
  rectangle: 234.283,113.183 236.983,115.883
  rectangle: 228.283,113.183 230.983,115.883
  rectangle: 222.283,113.183 224.983,115.883
  pour cut-out: 220.633,117.533 244.633,117.533 244.633,111.533 220.633,111.533
  region: 230.437,88.307
  pour cut-out: 259.68,82.04
Layer 1:
  pour cut-out: 220.633,117.533 244.633,117.533 244.633,111.533 220.633,111.533
Layer 6:
  pour cut-out: 232.285,87.452 233.02,87.451 233.02,77.756 cw(c229.532,77.756) 229.532,74.269 212.581,74.269 212.581,74.986 229.406,74.986 ccw(c229.406,77.843) 232.263,77.843 232.263,87.451
  pour cut-out: 236.67,111.5 236.66,111.5 236.66,103.38 237.4,103.38 cw(c237.4,100.84) 239.94,100.84 239.94,90.834 cw(c238.284,90.834) 238.284,89.178 235.5,89.178 cw(c235.5,89.43) 235.24,89.43 235.24,90.548 cw(c235.917,90.548) 235.917,91.225 236.785,91.225 ccw(c236.785,92.15) 237.71,92.15 237.71,99.12 ccw(c236.37,99.12) 236.37,100.46 235.15,100.46 cw(c235.15,102.91) 232.7,102.91 232.7,103.35 cw(c234.47,103.35) 234.47,105.12 ccw(c234.47,105.31) 234.66,105.31 234.66,111.53
  pour cut-out: 228.58,111.46 228.59,111.46 228.59,103.34 227.85,103.34 ccw(c227.85,100.8) 225.31,100.8 225.31,90.794 ccw(c226.966,90.794) 226.966,89.138 229.75,89.138 ccw(c229.75,89.39) 230.01,89.39 230.01,90.508 ccw(c229.333,90.508) 229.333,91.185 228.465,91.185 cw(c228.465,92.11) 227.54,92.11 227.54,99.08 cw(c228.88,99.08) 228.88,100.42 230.1,100.42 ccw(c230.1,102.87) 232.55,102.87 232.55,103.31 ccw(c230.78,103.31) 230.78,105.08 cw(c230.78,105.27) 230.59,105.27 230.59,111.49
  pour cut-out: 242.59,111.63 242.59,89.64 cw(c240.36,89.64) 240.36,87.41 235.628,87.41 cw(c235.628,87.821) 235.217,87.821 235.217,88.867 cw(c235.57,88.867) 235.57,89.22 237.374,89.236 239.193,89.22 ccw(c239.308,90.631) 240.225,89.552 ccw(c239.06,90.679) 240.68,90.707 240.68,111.57 ccw(c240.66,111.57) 240.66,111.59
  pour cut-out: 222.66,111.54 222.66,89.55 ccw(c224.89,89.55) 224.89,87.32 229.622,87.32 ccw(c229.622,87.731) 230.033,87.731 230.033,88.777 ccw(c229.68,88.777) 229.68,89.13 227.876,89.146 226.057,89.13 cw(c225.942,90.541) 225.025,89.462 cw(c226.19,90.589) 224.57,90.617 224.57,111.48 cw(c224.59,111.48) 224.59,111.5
  pour cut-out: 228.3,111.56
  pour cut-out: 220.633,117.533 244.633,117.533 244.633,111.533 220.633,111.533
Layer 2:
  pour cut-out: 220.633,117.533 244.633,117.533 244.633,111.533 220.633,111.533
  region: 239.833,116.333 240.033,114.783 240.033,114.283 243.233,114.283 243.233,114.783 243.433,116.333 243.433,112.733 239.833,112.733
  region: 239.833,116.333 240.033,114.783 243.233,114.783 243.433,116.333
  region: 233.833,116.333 234.033,114.783 234.033,114.283 237.233,114.283 237.233,114.783 237.433,116.333 237.433,112.733 233.833,112.733
  region: 233.833,116.333 234.033,114.783 237.233,114.783 237.433,116.333
  region: 227.833,116.333 228.033,114.783 228.033,114.283 231.233,114.283 231.233,114.783 231.433,116.333 231.433,112.733 227.833,112.733
  region: 227.833,116.333 228.033,114.783 231.233,114.783 231.433,116.333
  region: 221.833,116.333 222.033,114.783 222.033,114.283 225.233,114.283 225.233,114.783 225.433,116.333 225.433,112.733 221.833,112.733
  region: 221.833,116.333 222.033,114.783 225.233,114.783 225.433,116.333
Layer 5:
  pour cut-out: 241.333,113.537 cw(c241.633,113.537) 241.633,113.837 241.634,113.837 cw(c241.634,113.538) 241.933,113.538 cw(c241.631,113.538) 241.631,113.237 241.627,113.237 cw(c241.627,113.531) 241.333,113.531 241.333,113.537
  pour cut-out: 223.333,113.534 cw(c223.632,113.534) 223.632,113.833 223.633,113.833 cw(c223.633,113.533) 223.933,113.533 223.933,113.531 cw(c223.634,113.531) 223.634,113.232 cw(c223.634,113.533) 223.333,113.533
  pour cut-out: 229.333,113.533 cw(c229.633,113.533) 229.633,113.833 229.634,113.833 cw(c229.634,113.534) 229.933,113.534 cw(c229.631,113.534) 229.631,113.232 229.627,113.232 cw(c229.627,113.526) 229.333,113.526 229.333,113.533
  pour cut-out: 235.333,113.538 cw(c235.633,113.538) 235.633,113.838 235.635,113.838 cw(c235.635,113.539) 235.933,113.539 cw(c235.632,113.539) 235.632,113.237 235.627,113.237 cw(c235.627,113.531) 235.333,113.531 235.333,113.538
Layer 3:
  pour cut-out: 220.633,117.533 244.633,117.533 244.633,111.533 220.633,111.533
Layer 4:
  region net NetA2_F13: 241.133,115.833 241.333,115.833 241.333,114.233 241.933,114.233 241.933,115.833 242.133,115.833 242.133,114.283 242.133,114.235 241.933,114.033 241.933,113.532 cw(c241.634,113.532) 241.634,113.233 cw(c241.634,113.534) 241.333,113.534 241.333,114.033 241.233,114.133 241.132,114.232
  region net NetA2_B13: 235.133,115.833 235.333,115.833 235.333,114.233 235.933,114.233 235.933,115.833 236.133,115.833 236.133,114.283 236.133,114.235 235.933,114.033 235.933,113.532 cw(c235.634,113.532) 235.634,113.233 cw(c235.634,113.534) 235.333,113.534 235.333,114.033 235.233,114.133 235.132,114.232
  region net NetA2_B1: 229.133,115.833 229.333,115.833 229.333,114.233 229.933,114.233 229.933,115.833 230.133,115.833 230.133,114.283 230.133,114.235 229.933,114.033 229.933,113.532 cw(c229.634,113.532) 229.634,113.233 cw(c229.634,113.534) 229.333,113.534 229.333,114.033 229.233,114.133 229.132,114.232
  region net NetA2_F1: 223.133,115.833 223.333,115.833 223.333,114.233 223.933,114.233 223.933,115.833 224.133,115.833 224.133,114.283 224.133,114.235 223.933,114.033 223.933,113.532 cw(c223.634,113.532) 223.634,113.233 cw(c223.634,113.534) 223.333,113.534 223.333,114.033 223.233,114.133 223.132,114.232
  pour cut-out: 220.633,117.533 244.633,117.533 244.633,111.533 220.633,111.533
Bottom Layer:
  region net NetA2_F13: 241.483,111.533 ccw(c241.633,111.533) 241.633,111.383 ccw(c241.633,111.533) 241.783,111.533 241.783,113.533 ccw(c241.633,113.533) 241.633,113.683 241.628,113.683 ccw(c241.628,113.537) 241.483,113.537
  region net NetA2_B13: 235.488,111.532 ccw(c235.638,111.532) 235.638,111.382 ccw(c235.638,111.532) 235.788,111.532 235.788,113.532 ccw(c235.638,113.532) 235.638,113.682 235.633,113.682 ccw(c235.633,113.536) 235.488,113.536
  region net NetA2_B1: 229.483,111.529 ccw(c229.633,111.529) 229.633,111.379 ccw(c229.633,111.529) 229.783,111.529 229.783,113.529 ccw(c229.633,113.529) 229.633,113.678 229.628,113.678 ccw(c229.628,113.533) 229.483,113.533
  region net NetA2_F1: 223.483,111.533 ccw(c223.633,111.533) 223.633,111.383 ccw(c223.633,111.533) 223.783,111.533 223.783,113.533 ccw(c223.633,113.533) 223.633,113.683 223.628,113.683 ccw(c223.628,113.537) 223.483,113.537
  region: 171.74,180.45 172.34,180.45 172.34,181.654 ccw(c172.044,181.654) 172.044,181.95 172.04,181.95 ccw(c172.04,181.65) 171.74,181.65
  pour cut-out: 241.233,114.133 242.033,114.133 242.033,110.933 241.233,110.933
  pour cut-out: 235.233,114.133 236.033,114.133 236.033,110.933 235.233,110.933
  pour cut-out: 229.233,114.133 230.033,114.133 230.033,110.933 229.233,110.933
  pour cut-out: 223.233,114.133 224.033,114.133 224.033,110.933 223.233,110.933
  region net NetA2_G7: 232.398,87.044 232.883,87.044 232.716,87.921 232.552,87.919
  region net NetA2_F1: 229.38,88.564 229.38,88.064 230.234,88.227 230.232,88.413
  region net NetA2_B1: 229.38,90.164 229.38,89.664 230.234,89.827 230.232,90.013
  region net NetA2_F13: 235.876,88.076 235.876,88.576 235.022,88.413 235.024,88.227
  region net NetA2_B13: 235.876,89.676 235.876,90.176 235.022,90.013 235.024,89.827

## Silkscreen, mask and mechanical layers (free items; w line width, h text height)
Top Overlay:
  lines w0.4: 226.633,111.533 226.633,117.533 ; 232.633,111.533 232.633,117.533 ; 238.633,111.533 238.633,117.533 ; 220.633,111.533 220.633,117.533 244.633,117.533 244.633,111.533 220.633,111.533
Bottom Overlay:
  text "GND" at 272.13,101.13 h1
  text "ADR1" at 254.94,101.04 h1
  text "GND" at 272.159,98.584 h1
  text "ADR0" at 254.88,98.5 h1
  text "GND" at 272.189,95.974 h1
  text "RESET" at 254.79,95.96 h1
  text "GND" at 272.189,93.514 h1
  text "MISO" at 254.71,93.5 h1
  text "SEB" at 254.82,91.02 h1
  text "GND" at 272.099,90.854 h1
  text "SCLK" at 254.91,88.36 h1
  text "GND" at 272.071,88.367 h1
  text "MOSI" at 254.92,85.89 h1
  text "GND" at 272.069,85.794 h1
  text "Fast_T/R" at 255.01,83.423 h1
  text "GND" at 272.039,83.334 h1
  text "Fast_set" at 255,80.933 h1
  text "GND" at 272.009,80.694 h1
  text "ADR2" at 255.19,78.18 h1
  text "GND" at 272.02,78.09 h1
  text "ADR3" at 255.17,75.68 h1
  text "GND" at 271.929,75.574 h1
  text "VDD" at 255.13,73.2 h1
  text "GND" at 271.899,73.084 h1
  text "Vdd_1.2V" at 254.96,70.553 h1
  text "GND" at 271.849,70.484 h1
  text "MADE BY LJW_SEU" at 269.28,64.663 h1
Top Solder:
  rectangle: 220.32,111.22 244.97,117.83
  region: 217.536,81.686 211.186,81.686 211.186,67.716 217.536,67.716
  lines w0.254: 229.963,91.1 229.983,91.08
Bottom Solder:
  rectangle: 211.186,67.716 217.536,81.686
  region: 232.893,86.96 232.893,88.03 232.383,88.03 232.383,86.96
  rectangle: 229.173,88.06 230.243,88.57
  rectangle: 229.173,89.67 230.243,90.18
  rectangle: 234.983,88.08 236.053,88.59
  rectangle: 235.013,89.68 236.083,90.19
  region: 241.483,111.533 ccw(c241.633,111.533) 241.633,111.383 ccw(c241.633,111.533) 241.783,111.533 241.783,113.533 ccw(c241.633,113.533) 241.633,113.683 241.628,113.683 ccw(c241.628,113.537) 241.483,113.537
  region: 235.488,111.532 ccw(c235.638,111.532) 235.638,111.382 ccw(c235.638,111.532) 235.788,111.532 235.788,113.532 ccw(c235.638,113.532) 235.638,113.682 235.633,113.682 ccw(c235.633,113.536) 235.488,113.536
  region: 229.494,111.584 ccw(c229.644,111.584) 229.644,111.434 ccw(c229.644,111.584) 229.794,111.584 229.794,113.584 ccw(c229.644,113.584) 229.644,113.734 229.64,113.734 ccw(c229.64,113.589) 229.494,113.589
  region: 223.483,111.533 ccw(c223.633,111.533) 223.633,111.383 ccw(c223.633,111.533) 223.783,111.533 223.783,113.533 ccw(c223.633,113.533) 223.633,113.683 223.628,113.683 ccw(c223.628,113.537) 223.483,113.537
  region: 202.946,148.336